# EAGLE board A10S-OLinuXino-MICRO (EAGLE 4.16), part 1 of 4
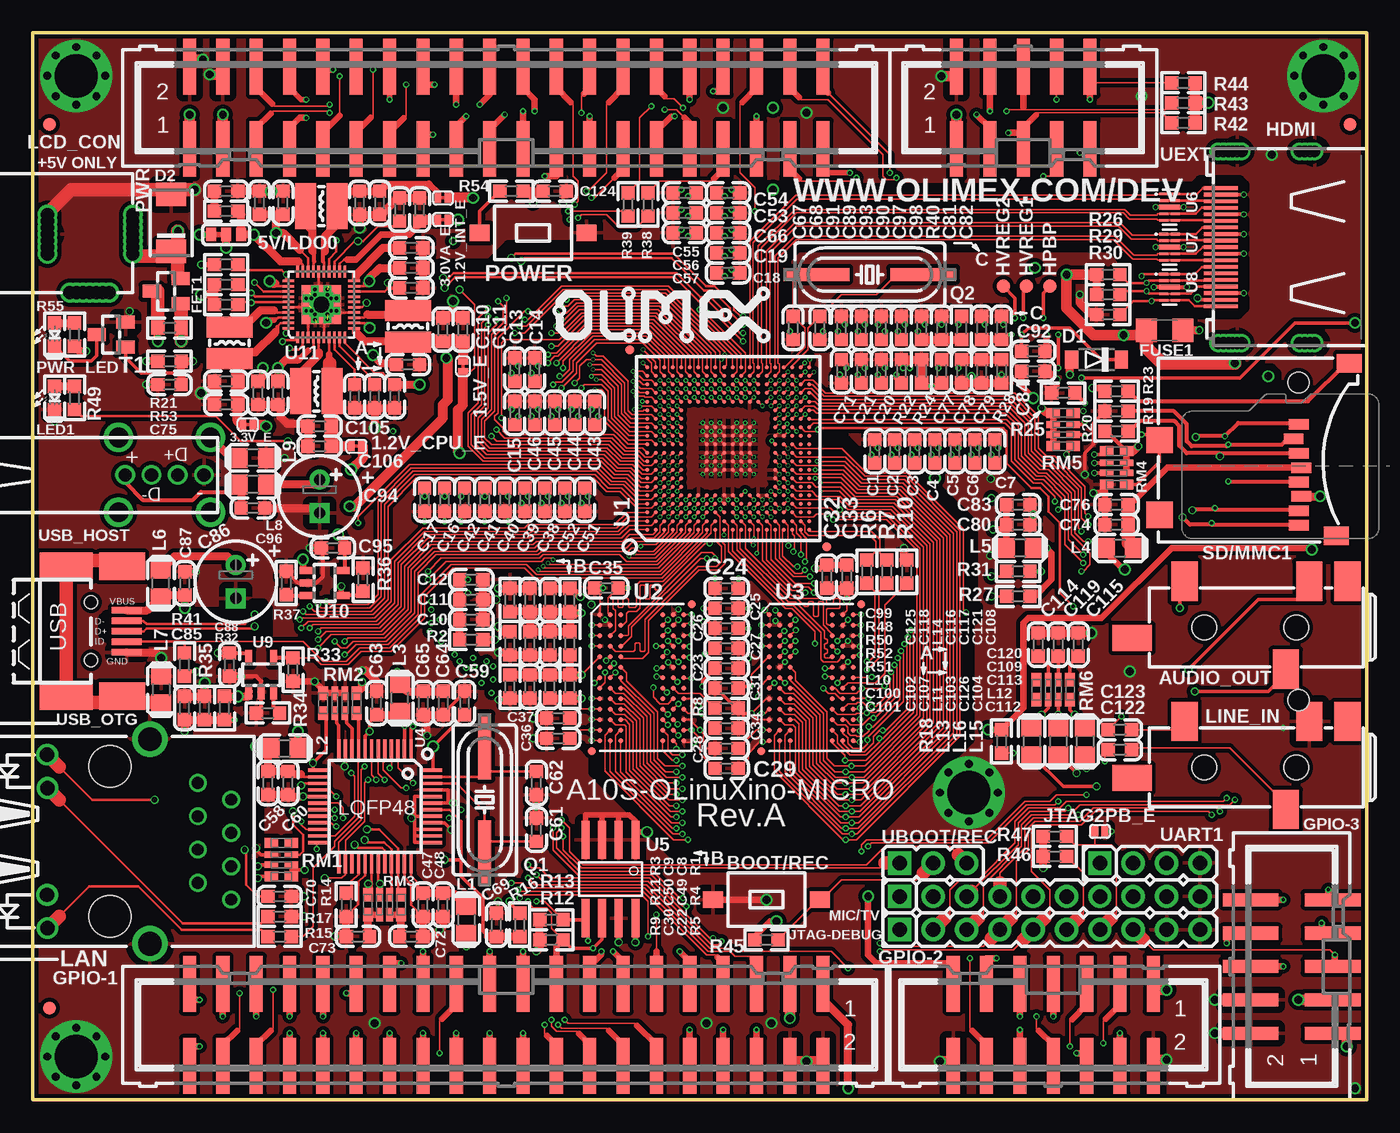
[diagram p0: board, top side]
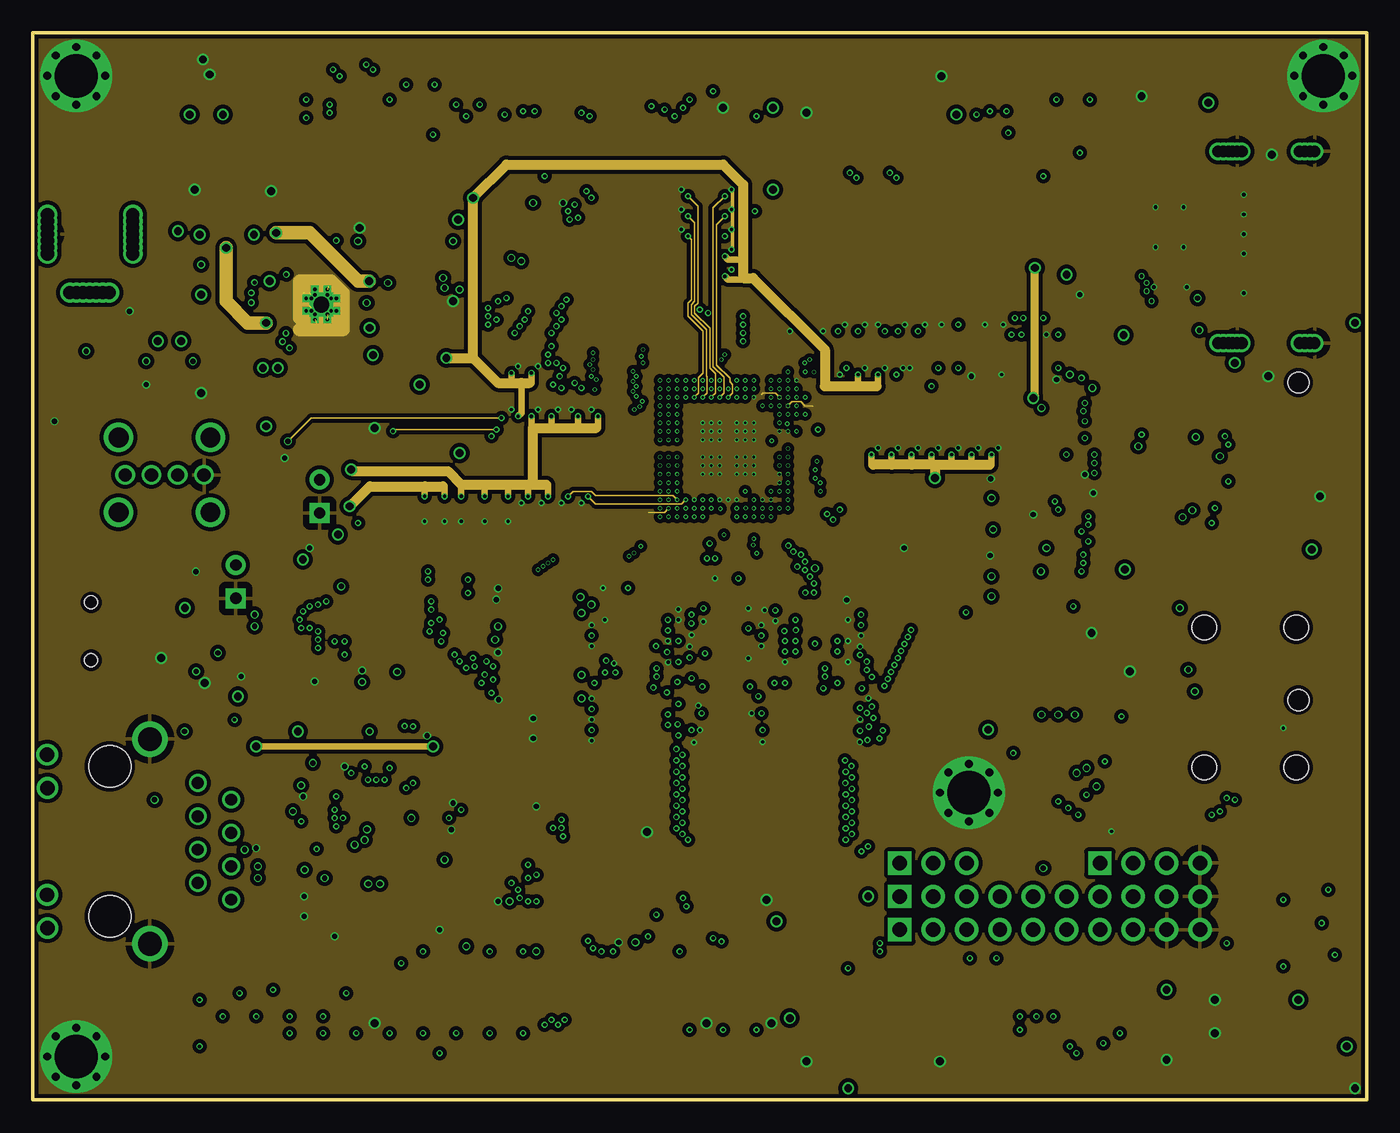
[diagram p1: board, inner layer Route2]
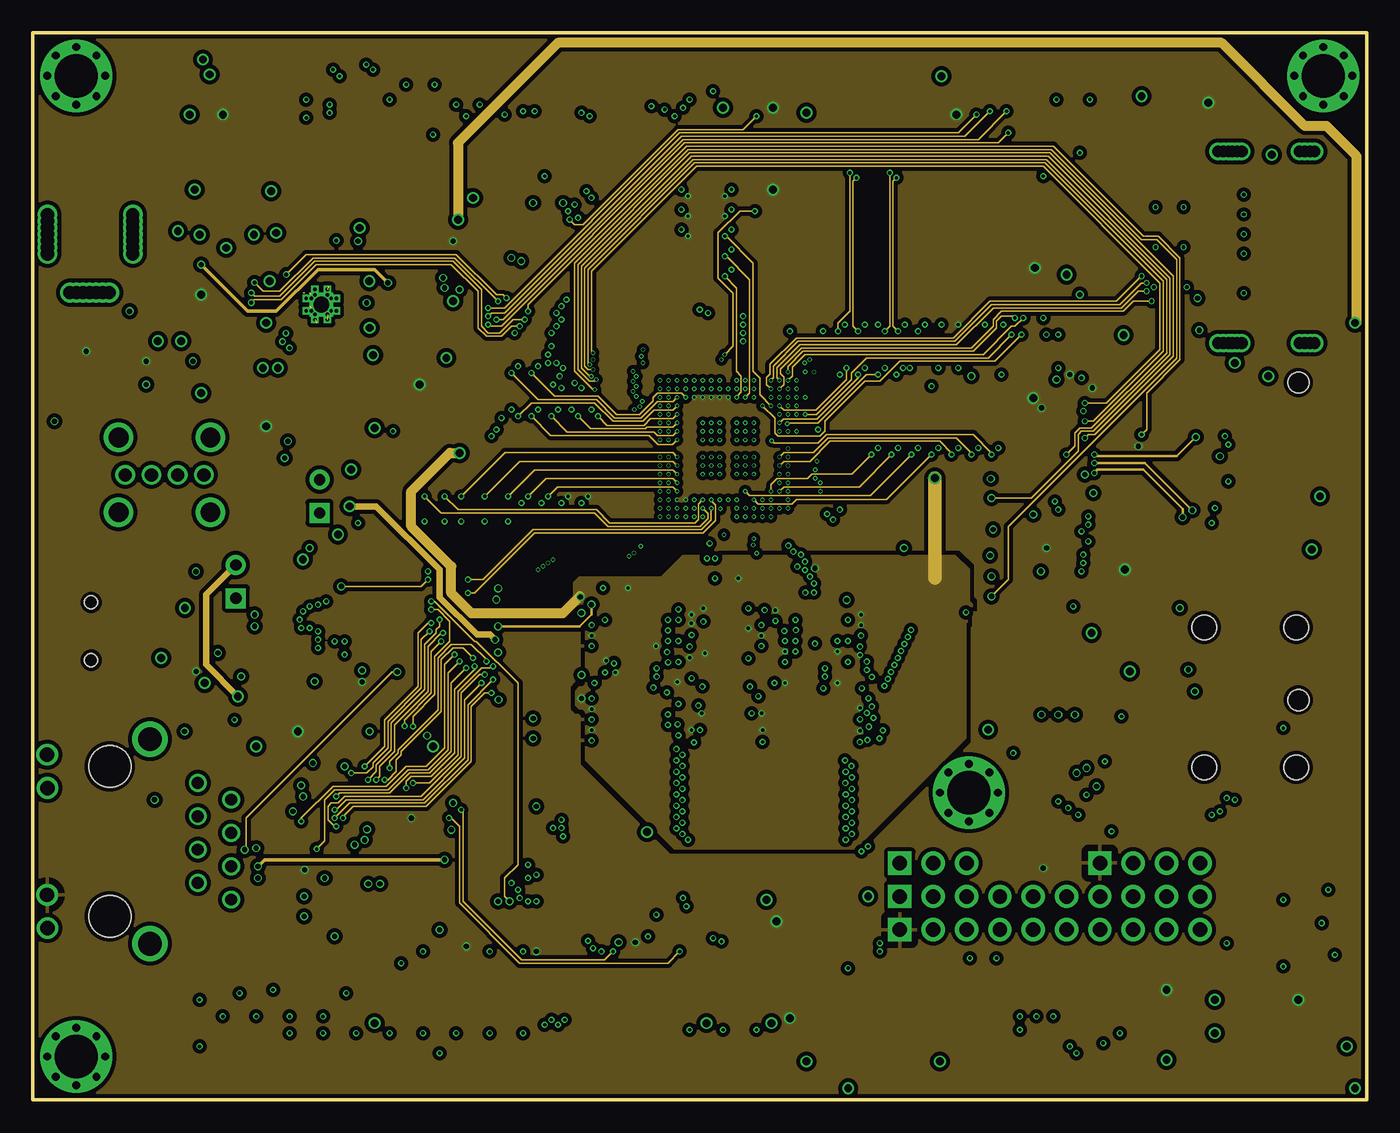
[diagram p2: board, inner layer Route15]
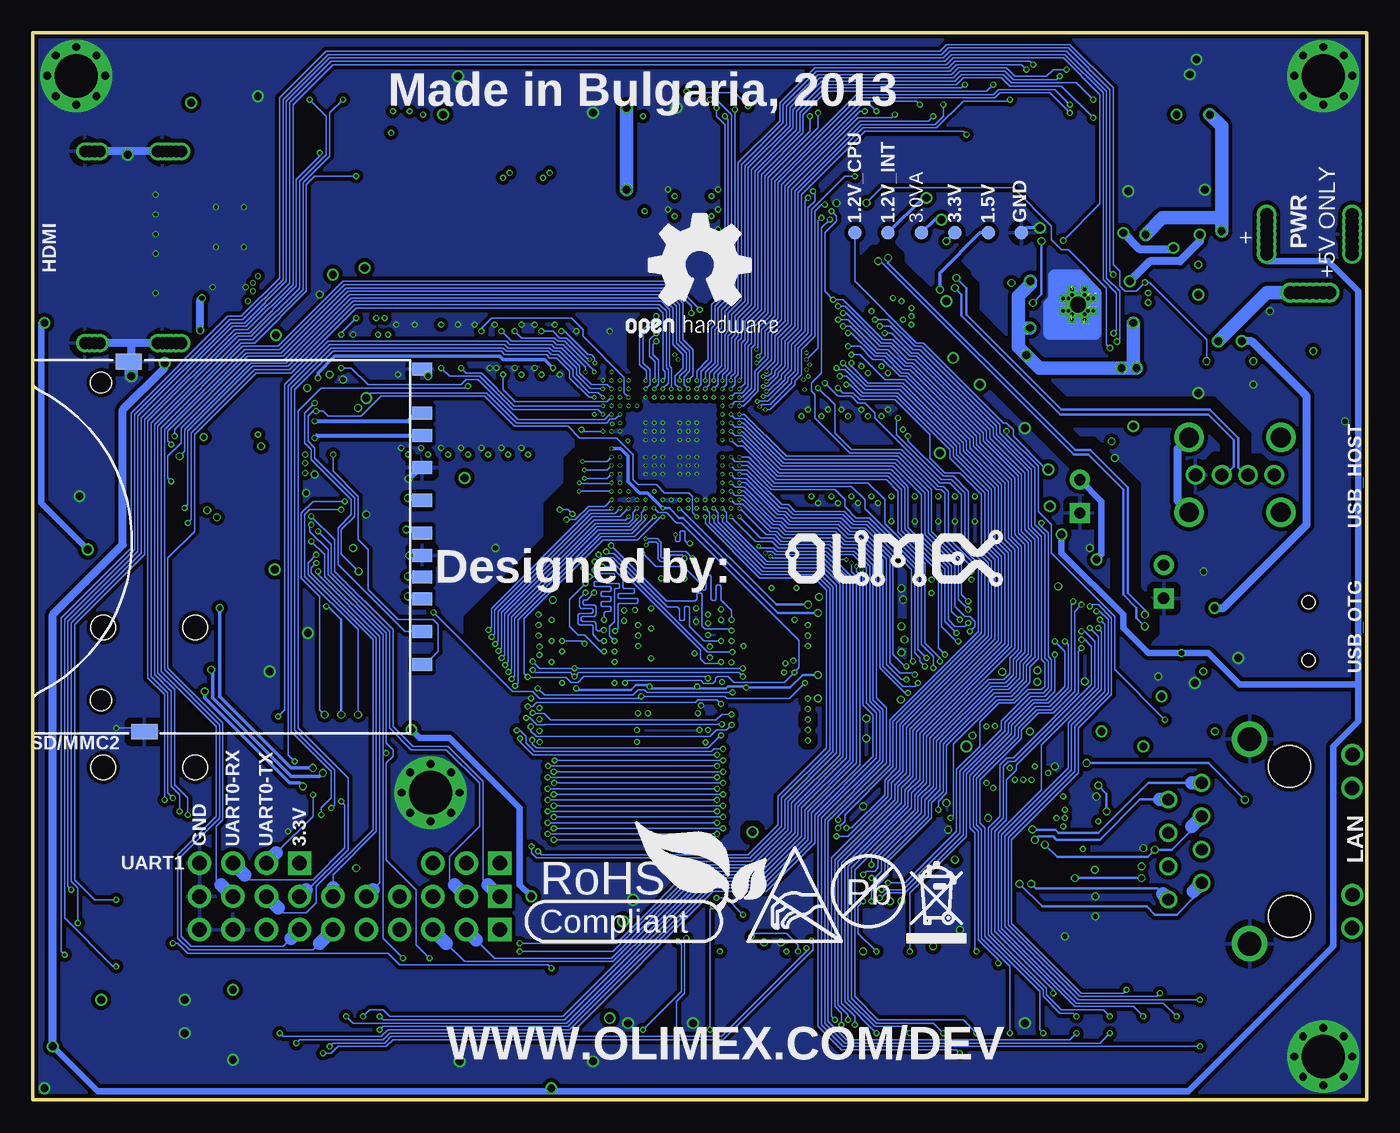
[diagram p3: board, bottom side, seen from below]

Size 101.6 x 81.28 mm. Coordinates in mm from the lower left corner, seen from the top.
Outline: 0,0 101.6,0 101.6,81.28 0,81.28 0,0
Copper layers (1*2*15*16): Top 0.018mm / dielectric 0.12mm / Route2 0.035mm / dielectric 1.2mm / Route15 0.035mm / dielectric 0.12mm / Bottom 0.018mm
Design rules "default": minimum track width 4mil, minimum drill 0.2mm, track to track 5mil, track to pad 0.1067mm, pad to pad 0.1067mm, via to via 0.1067mm, smd to smd 1mil, copper to edge 10mil, drill to drill 8mil, minimum pad ring 6mil, minimum via ring 2.5mil, stop-mask expansion 4mil, vias tented up to drill 25mil, thermal gap 20mil
Net classes: 0 default: width 0.107 mm; 1 PWR: width 0.107 mm, drill 0.076 mm, clearance 0.2 mm
tRestrict: 158 lines
bRestrict: 218 lines

## Footprints (pad centres in the part's own frame; a part is rotated, then mirrored left to right if it is on the bottom)
TESTPAD_40-ROUND = smd 1.016 x 1.016: 1 0,0
SJ_1_SMALLER_CLOSE = smd 0.508 x 0.762: 1 -0.381,0; 2 0.381,0
SJ_2_SMALL_12_TIED = smd 0.762 x 1.016: 1 -1.143,0; 2 0,0; 3 1.143,0
PJ-W47S-05D2-LF_5PIN_V2 = smd 2 x 3: 1 2.1,-0.5; 2 14.5,-0.5; 3 6.8,6.2; 5 5,-0.5 | smd 3 x 2: 4 18.5,3.8 | hole 1.9: 6,3; 13,3
SW-TAKT_6X3.5_SMD = smd 1.27 x 1.524: P$1 0,4.064; P$2 0,-4.064
C0603_DWS = smd 1.016 x 1.016: 1 -0.889,0; 2 0.889,0
E2,5-6,3 = drill 0.864 pad 1.524 round: + -1.27,0 | drill 0.864 pad 1.524 square: - 1.27,0
SOD-123 = smd 1 x 1.4: A 1.9,0; C -1.9,0
DO214AA = smd 1.778 x 2.286: A 2.177,0; C -2.177,0
SOT23 = smd 1 x 1.4: 1 -0.95,-1.1; 2 0.95,-1.1; 3 0,1.1
1206 = smd 1.6 x 1.8: 1 -1.4,0; 2 1.4,0
ML40-MALE(GBH-254-SMT-40) = smd 1 x 4.25: 1 -24.13,-3.125; 2 -24.13,3.125; 3 -21.59,-3.125; 4 -21.59,3.125; 5 -19.05,-3.125; 6 -19.05,3.125; 7 -16.51,-3.125; 8 -16.51,3.125; 9 -13.97,-3.125; 10 -13.97,3.125; 11 -11.43,-3.125; 12 -11.43,3.125; 13 -8.89,-3.125; 14 -8.89,3.125; 15 -6.35,-3.125; 16 -6.35,3.125; 17 -3.81,-3.125; 18 -3.81,3.125; 19 -1.27,-3.125; 20 -1.27,3.125; 21 1.27,-3.125; 22 1.27,3.125; 23 3.81,-3.125; 24 3.81,3.125; 25 6.35,-3.125; 26 6.35,3.125; 27 8.89,-3.125; 28 8.89,3.125; 29 11.43,-3.125; 30 11.43,3.125; 31 13.97,-3.125; 32 13.97,3.125; 33 16.51,-3.125; 34 16.51,3.125; 35 19.05,-3.125; 36 19.05,3.125; 37 21.59,-3.125; 38 21.59,3.125; 39 24.13,-3.125; 40 24.13,3.125
ML14_S = smd 1 x 4.25: 1 -7.62,-3.125; 2 -7.62,3.125; 3 -5.08,-3.125; 4 -5.08,3.125; 5 -2.54,-3.125; 6 -2.54,3.125; 7 0,-3.125; 8 0,3.125; 9 2.54,-3.125; 10 2.54,3.125; 11 5.08,-3.125; 12 5.08,3.125; 13 7.62,-3.125; 14 7.62,3.125
ML10_S = smd 1 x 4.25: 1 -5.08,-3.125; 2 -5.08,3.125; 3 -2.54,-3.125; 4 -2.54,3.125; 5 0,-3.125; 6 0,3.125; 7 2.54,-3.125; 8 2.54,3.125; 9 5.08,-3.125; 10 5.08,3.125
HDMI-SWM-19 = smd 2.6 x 0.28: 1 1.3,4.5; 2 1.3,4; 3 1.3,3.5; 4 1.3,3; 5 1.3,2.5; 6 1.3,2; 7 1.3,1.5; 8 1.3,1; 9 1.3,0.5; 10 1.3,0; 11 1.3,-0.5; 12 1.3,-1; 13 1.3,-1.5; 14 1.3,-2; 15 1.3,-2.5; 16 1.3,-3; 17 1.3,-3.5; 18 1.3,-4; 19 1.3,-4.5 | drill 0.9 round: P$5 1.5,7.3; P$7 7.7,7.3; P$9 7.7,-7.3; P$11 1.5,-7.3; P$13 1.9,7.3; P$15 8.1,7.3; P$18 8.1,-7.3; P$20 1.9,-7.3; P$21 2.2,7.3; P$22 2.9,7.3; P$23 2.9,-7.3; P$24 2.2,-7.3; P$25 1.1,7.3; P$26 1.1,-7.3; P$27 7.3,-7.3; P$28 7.3,7.3; SH1 2.55,7.3; SH2 8.45,7.3; SH3 8.45,-7.3; SH4 2.55,-7.3
SJ_1_SMALLER = smd 0.508 x 0.762: 1 -0.381,0; 2 0.381,0
HN1X10 = drill 1.1 pad 1.778 square: 1 -11.43,0 | drill 1.1 pad 1.778 round: 2 -8.89,0; 3 -6.35,0; 4 -3.81,0; 5 -1.27,0; 6 1.27,0; 7 3.81,0; 8 6.35,0; 9 8.89,0; 10 11.43,0
L0805_5MIL_DWS = smd 1.27 x 1.524: 1 -1.016,0; 2 1.016,0
CD32 = smd 3.5 x 1.6: 1 0,1.2; 2 0,-1.2
RJLBC-060TC1 = drill 0.9 round: 1 -4.455,6.7; 2 -3.185,9.24; 3 -1.915,6.7; 4 -0.645,9.24; 5 0.625,6.7; 6 1.895,9.24; 7 3.165,6.7; 8 4.435,9.24 | drill 1.1 round: AG 4.07,-4.773; AY -6.61,-4.773; KG 6.61,-4.748; KY -4.07,-4.748 | drill 1.8 round: GND1 -7.8,3.05; GND2 7.8,3.05 | hole 3.2: -5.715,0; 5.715,0
LED-0603 = smd 1.016 x 1.016: A 0.889,0; C -0.889,0
PWR_JACK_UNI_MILLING = drill 1 round: + 0,4.75; +1 0,5.25; +2 0,5.75; +3 0,6.25; +4 0,4.25; +5 0,3.75; +6 0,3.25; - -6.5,4.75; -1 -6.5,5.25; -2 -6.5,5.75; -3 -6.5,4.25; -4 -6.5,3.75; -5 -6.5,6.25; -6 -6.5,3.25; -- -3.3,0.3; --1 -3.8,0.3; --2 -4.3,0.3; --3 -4.8,0.3; --4 -2.8,0.3; --5 -2.3,0.3; --6 -1.8,0.3
HC49/SMD2_THIN = smd 5 x 1: 1 -4.064,0; 2 4.064,0
R0603_5MIL_DWS = smd 1.016 x 1.016: 1 -0.889,0; 2 0.889,0
0603_0R = smd 1.016 x 1.016: 1 -0.889,0; 2 0.889,0
R_MATRIX_4 = smd 1.016 x 0.762: 1.1 -0.762,1.27; 1.2 0.762,1.27; 4.1 -0.762,-1.27; 4.2 0.762,-1.27 | smd 1.016 x 0.508: 2.1 -0.762,0.381; 2.2 0.762,0.381; 3.1 -0.762,-0.381; 3.2 0.762,-0.381
TFR-MEM-CON = smd 0.8 x 1.5: 1 -3.2,10.7; 2 -2.1,10.3; 3 -1,10.7; 4 0.1,10.9; 5 1.2,10.7; 6 2.3,10.9; 7 3.4,10.7; 8 4.5,10.7 | smd 2 x 2: 9 3.7,0.1; 10 -2,0.1 | smd 1.4 x 1.9: 11 5.3,13.55; 12 -7.85,14.55
SD_CARD = smd 1 x 1.5: 1 6.88,15.3; 2 4.38,15.3; 3 1.08,15.3; 4 -0.63,15.3; 5 -3.13,15.3; 6 -5.63,15.3; 7 -8.06,15.3; 8 -9.76,15.3; 9 9.38,15.3; CD 2.73,15.3; WP -13.11,15.3 | smd 1.2 x 2: SH1 -13.7,-7.05; SH2 14.5,-5.85 | hole 1.6: -12.09,-9.15; 12.1,-9.15
SOT-23 = smd 1 x 1.4: 1 -0.95,-1.1; 2 0.95,-1.1; 3 0,1.1
TFBGA336 = smd 0.32 x 0.32: A1 -6.175,6.175; A2 -5.525,6.175; A3 -4.875,6.175; A4 -4.225,6.175; A5 -3.575,6.175; A6 -2.925,6.175; A7 -2.275,6.175; A8 -1.625,6.175; A9 -0.975,6.175; A10 -0.325,6.175; A11 0.325,6.175; A12 0.975,6.175; A13 1.625,6.175; A14 2.275,6.175; A15 2.925,6.175; A16 3.575,6.175; A17 4.225,6.175; A18 4.875,6.175; A19 5.525,6.175; A20 6.175,6.175; B1 -6.175,5.525; B2 -5.525,5.525; B3 -4.875,5.525; B4 -4.225,5.525; B5 -3.575,5.525; B6 -2.925,5.525; B7 -2.275,5.525; B8 -1.625,5.525; B9 -0.975,5.525; B10 -0.325,5.525; B11 0.325,5.525; B12 0.975,5.525; B13 1.625,5.525; B14 2.275,5.525; B15 2.925,5.525; B16 3.575,5.525; B17 4.225,5.525; B18 4.875,5.525; B19 5.525,5.525; B20 6.175,5.525; C1 -6.175,4.875; C2 -5.525,4.875; C3 -4.875,4.875; C4 -4.225,4.875; C5 -3.575,4.875; C6 -2.925,4.875; C7 -2.275,4.875; C8 -1.625,4.875; C9 -0.975,4.875; C10 -0.325,4.875; C11 0.325,4.875; C12 0.975,4.875; C13 1.625,4.875; C14 2.275,4.875; C15 2.925,4.875; C16 3.575,4.875; C17 4.225,4.875; C18 4.875,4.875; C19 5.525,4.875; C20 6.175,4.875; D1 -6.175,4.225; D2 -5.525,4.225; D3 -4.875,4.225; D4 -4.225,4.225; D5 -3.575,4.225; D6 -2.925,4.225; D7 -2.275,4.225; D8 -1.625,4.225; D9 -0.975,4.225; D10 -0.325,4.225; D11 0.325,4.225; D12 0.975,4.225; D13 1.625,4.225; D14 2.275,4.225; D15 2.925,4.225; D16 3.575,4.225; D17 4.225,4.225; D18 4.875,4.225; D19 5.525,4.225; D20 6.175,4.225; E1 -6.175,3.575; E2 -5.525,3.575; E3 -4.875,3.575; E4 -4.225,3.575; E5 -3.575,3.575; E6 -2.925,3.575; E7 -2.275,3.575; E8 -1.625,3.575; E9 -0.975,3.575; E10 -0.325,3.575; E11 0.325,3.575; E12 0.975,3.575; E13 1.625,3.575; E14 2.275,3.575; E15 2.925,3.575; E16 3.575,3.575; E17 4.225,3.575; E18 4.875,3.575; E19 5.525,3.575; E20 6.175,3.575; F1 -6.175,2.925; F2 -5.525,2.925; F3 -4.875,2.925; F4 -4.225,2.925; F5 -3.575,2.925; F16 3.575,2.925; F17 4.225,2.925; F18 4.875,2.925; F19 5.525,2.925; F20 6.175,2.925; G1 -6.175,2.275; G2 -5.525,2.275; G3 -4.875,2.275; G4 -4.225,2.275; G5 -3.575,2.275; G16 3.575,2.275; G17 4.225,2.275; G18 4.875,2.275; G19 5.525,2.275; G20 6.175,2.275; H1 -6.175,1.625; H2 -5.525,1.625; H3 -4.875,1.625; H4 -4.225,1.625; H5 -3.575,1.625; H8 -1.625,1.625; H9 -0.975,1.625; H10 -0.325,1.625; H11 0.325,1.625; H12 0.975,1.625; H13 1.625,1.625; H16 3.575,1.625; H17 4.225,1.625; H18 4.875,1.625; H19 5.525,1.625; H20 6.175,1.625; J1 -6.175,0.975; J2 -5.525,0.975; J3 -4.875,0.975; J4 -4.225,0.975; J5 -3.575,0.975; J8 -1.625,0.975; J9 -0.975,0.975; J10 -0.325,0.975; J11 0.325,0.975; J12 0.975,0.975; J13 1.625,0.975; J16 3.575,0.975; J17 4.225,0.975; J18 4.875,0.975; J19 5.525,0.975; J20 6.175,0.975; K1 -6.175,0.325; K2 -5.525,0.325; K3 -4.875,0.325; K4 -4.225,0.325; K5 -3.575,0.325; K8 -1.625,0.325; K9 -0.975,0.325; K10 -0.325,0.325; K11 0.325,0.325; K12 0.975,0.325; K13 1.625,0.325; K16 3.575,0.325; K17 4.225,0.325; K18 4.875,0.325; K19 5.525,0.325; K20 6.175,0.325; L1 -6.175,-0.325; L2 -5.525,-0.325; L3 -4.875,-0.325; L4 -4.225,-0.325; L5 -3.575,-0.325; L8 -1.625,-0.325; L9 -0.975,-0.325; L10 -0.325,-0.325; L11 0.325,-0.325; L12 0.975,-0.325; L13 1.625,-0.325; L16 3.575,-0.325; L17 4.225,-0.325; L18 4.875,-0.325; L19 5.525,-0.325; L20 6.175,-0.325; M1 -6.175,-0.975; M2 -5.525,-0.975; M3 -4.875,-0.975; M4 -4.225,-0.975; M5 -3.575,-0.975; M8 -1.625,-0.975; M9 -0.975,-0.975; M10 -0.325,-0.975; M11 0.325,-0.975; M12 0.975,-0.975; M13 1.625,-0.975; M16 3.575,-0.975; M17 4.225,-0.975; M18 4.875,-0.975; M19 5.525,-0.975; M20 6.175,-0.975; N1 -6.175,-1.625; N2 -5.525,-1.625; N3 -4.875,-1.625; N4 -4.225,-1.625; N5 -3.575,-1.625; N8 -1.625,-1.625; N9 -0.975,-1.625; N10 -0.325,-1.625; N11 0.325,-1.625; N12 0.975,-1.625; N13 1.625,-1.625; N16 3.575,-1.625; N17 4.225,-1.625; N18 4.875,-1.625; N19 5.525,-1.625; N20 6.175,-1.625; P1 -6.175,-2.275; P2 -5.525,-2.275; P3 -4.875,-2.275; P4 -4.225,-2.275; P5 -3.575,-2.275; P16 3.575,-2.275; P17 4.225,-2.275; P18 4.875,-2.275; P19 5.525,-2.275; P20 6.175,-2.275; R1 -6.175,-2.925; R2 -5.525,-2.925; R3 -4.875,-2.925; R4 -4.225,-2.925; R5 -3.575,-2.925; R16 3.575,-2.925; R17 4.225,-2.925; R18 4.875,-2.925; R19 5.525,-2.925; R20 6.175,-2.925; T1 -6.175,-3.575; T2 -5.525,-3.575; T3 -4.875,-3.575; T4 -4.225,-3.575; T5 -3.575,-3.575; T6 -2.925,-3.575; T7 -2.275,-3.575; T8 -1.625,-3.575; T9 -0.975,-3.575; T10 -0.325,-3.575; T11 0.325,-3.575; T12 0.975,-3.575; T13 1.625,-3.575; T14 2.275,-3.575; T15 2.925,-3.575; T16 3.575,-3.575; T17 4.225,-3.575; T18 4.875,-3.575; T19 5.525,-3.575; T20 6.175,-3.575; U1 -6.175,-4.225; U2 -5.525,-4.225; U3 -4.875,-4.225; U4 -4.225,-4.225; U5 -3.575,-4.225; U6 -2.925,-4.225; U7 -2.275,-4.225; U8 -1.625,-4.225; U9 -0.975,-4.225; U10 -0.325,-4.225; U11 0.325,-4.225; U12 0.975,-4.225; U13 1.625,-4.225; U14 2.275,-4.225; U15 2.925,-4.225; U16 3.575,-4.225; U17 4.225,-4.225; U18 4.875,-4.225; U19 5.525,-4.225; U20 6.175,-4.225; V1 -6.175,-4.875; V2 -5.525,-4.875; V3 -4.875,-4.875; V4 -4.225,-4.875; V5 -3.575,-4.875; V6 -2.925,-4.875; V7 -2.275,-4.875; V8 -1.625,-4.875; V9 -0.975,-4.875; V10 -0.325,-4.875; V11 0.325,-4.875; V12 0.975,-4.875; V13 1.625,-4.875; V14 2.275,-4.875; V15 2.925,-4.875; V16 3.575,-4.875; V17 4.225,-4.875; V18 4.875,-4.875; V19 5.525,-4.875; V20 6.175,-4.875; W1 -6.175,-5.525; W2 -5.525,-5.525; W3 -4.875,-5.525; W4 -4.225,-5.525; W5 -3.575,-5.525; W6 -2.925,-5.525; W7 -2.275,-5.525; W8 -1.625,-5.525; W9 -0.975,-5.525; W10 -0.325,-5.525; W11 0.325,-5.525; W12 0.975,-5.525; W13 1.625,-5.525; W14 2.275,-5.525; W15 2.925,-5.525; W16 3.575,-5.525; W17 4.225,-5.525; W18 4.875,-5.525; W19 5.525,-5.525; W20 6.175,-5.525; Y1 -6.175,-6.175; Y2 -5.525,-6.175; Y3 -4.875,-6.175; Y4 -4.225,-6.175; Y5 -3.575,-6.175; Y6 -2.925,-6.175; Y7 -2.275,-6.175; Y8 -1.625,-6.175; Y9 -0.975,-6.175; Y10 -0.325,-6.175; Y11 0.325,-6.175; Y12 0.975,-6.175; Y13 1.625,-6.175; Y14 2.275,-6.175; Y15 2.925,-6.175; Y16 3.575,-6.175; Y17 4.225,-6.175; Y18 4.875,-6.175; Y19 5.525,-6.175; Y20 6.175,-6.175 | smd 0.7 x 0.7: FID1 -7.5,-7.5; FID2 7.5,7.5
FBGA78 = smd 0.4 x 0.4: A1 -3.2,4.8; A2 -2.4,4.8; A3 -1.6,4.8; A7 1.6,4.8; A8 2.4,4.8; A9 3.2,4.8; B1 -3.2,4; B2 -2.4,4; B3 -1.6,4; B7 1.6,4; B8 2.4,4; B9 3.2,4; C1 -3.2,3.2; C2 -2.4,3.2; C3 -1.6,3.2; C7 1.6,3.2; C8 2.4,3.2; C9 3.2,3.2; D1 -3.2,2.4; D2 -2.4,2.4; D3 -1.6,2.4; D7 1.6,2.4; D8 2.4,2.4; D9 3.2,2.4; E1 -3.2,1.6; E2 -2.4,1.6; E3 -1.6,1.6; E7 1.6,1.6; E8 2.4,1.6; E9 3.2,1.6; F1 -3.2,0.8; F2 -2.4,0.8; F3 -1.6,0.8; F7 1.6,0.8; F8 2.4,0.8; F9 3.2,0.8; G1 -3.2,0; G2 -2.4,0; G3 -1.6,0; G7 1.6,0; G8 2.4,0; G9 3.2,0; H1 -3.2,-0.8; H2 -2.4,-0.8; H3 -1.6,-0.8; H7 1.6,-0.8; H8 2.4,-0.8; H9 3.2,-0.8; J1 -3.2,-1.6; J2 -2.4,-1.6; J3 -1.6,-1.6; J7 1.6,-1.6; J8 2.4,-1.6; J9 3.2,-1.6; K1 -3.2,-2.4; K2 -2.4,-2.4; K3 -1.6,-2.4; K7 1.6,-2.4; K8 2.4,-2.4; K9 3.2,-2.4; L1 -3.2,-3.2; L2 -2.4,-3.2; L3 -1.6,-3.2; L7 1.6,-3.2; L8 2.4,-3.2; L9 3.2,-3.2; M1 -3.2,-4; M2 -2.4,-4; M3 -1.6,-4; M7 1.6,-4; M8 2.4,-4; M9 3.2,-4; N1 -3.2,-4.8; N2 -2.4,-4.8; N3 -1.6,-4.8; N7 1.6,-4.8; N8 2.4,-4.8; N9 3.2,-4.8 | smd 0.6 x 0.6: FID1 -3.8,-5.6; FID2 3.8,5.6
LQFP48 = smd 0.254 x 1.6: 1 -2.75,-4.3; 2 -2.25,-4.3; 3 -1.75,-4.3; 4 -1.25,-4.3; 5 -0.75,-4.3; 6 -0.25,-4.3; 7 0.25,-4.3; 8 0.75,-4.3; 9 1.25,-4.3; 10 1.75,-4.3; 11 2.25,-4.3; 12 2.75,-4.3; 25 2.75,4.3; 26 2.25,4.3; 27 1.75,4.3; 28 1.25,4.3; 29 0.75,4.3; 30 0.25,4.3; 31 -0.25,4.3; 32 -0.75,4.3; 33 -1.25,4.3; 34 -1.75,4.3; 35 -2.25,4.3; 36 -2.75,4.3 | smd 1.6 x 0.254: 13 4.3,-2.75; 14 4.3,-2.25; 15 4.3,-1.75; 16 4.3,-1.25; 17 4.3,-0.75; 18 4.3,-0.25; 19 4.3,0.25; 20 4.3,0.75; 21 4.3,1.25; 22 4.3,1.75; 23 4.3,2.25; 24 4.3,2.75; 37 -4.3,2.75; 38 -4.3,2.25; 39 -4.3,1.75; 40 -4.3,1.25; 41 -4.3,0.75; 42 -4.3,0.25; 43 -4.3,-0.25; 44 -4.3,-0.75; 45 -4.3,-1.25; 46 -4.3,-1.75; 47 -4.3,-2.25; 48 -4.3,-2.75
SO-08MN = smd 0.61 x 2.921: 1 -1.905,-2.981; 2 -0.635,-2.981; 3 0.635,-2.981; 4 1.905,-2.981; 5 1.905,2.981; 6 0.635,2.981; 7 -0.635,2.981; 8 -1.905,2.981
SLP2510P8 = smd 0.2 x 0.675: 1 -1,-0.438; 2 -0.5,-0.438; 4 0.5,-0.438; 5 1,-0.438; 6 1,0.438; 7 0.5,0.438; 9 -0.5,0.438; 10 -1,0.438 | smd 0.4 x 0.775: 3 0,-0.388; 8 0,0.388
SOT23-5 = smd 0.55 x 1.2: 1 -0.95,-1.3; 2 0,-1.3; 3 0.95,-1.3; 4 0.95,1.3; 5 -0.95,1.3
QFN40_5X5 = smd 0.2 x 0.9: 1 -1.8,-2.5; 2 -1.4,-2.5; 3 -1,-2.5; 4 -0.6,-2.5; 5 -0.2,-2.5; 6 0.2,-2.5; 7 0.6,-2.5; 8 1,-2.5; 9 1.4,-2.5; 10 1.8,-2.5; 21 1.8,2.5; 22 1.4,2.5; 23 1,2.5; 24 0.6,2.5; 25 0.2,2.5; 26 -0.2,2.5; 27 -0.6,2.5; 28 -1,2.5; 29 -1.4,2.5; 30 -1.8,2.5 | smd 0.9 x 0.2: 11 2.5,-1.8; 12 2.5,-1.4; 13 2.5,-1; 14 2.5,-0.6; 15 2.5,-0.2; 16 2.5,0.2; 17 2.5,0.6; 18 2.5,1; 19 2.5,1.4; 20 2.5,1.8; 31 -2.5,1.8; 32 -2.5,1.4; 33 -2.5,1; 34 -2.5,0.6; 35 -2.5,0.2; 36 -2.5,-0.2; 37 -2.5,-0.6; 38 -2.5,-1; 39 -2.5,-1.4; 40 -2.5,-1.8 | drill 1.2 pad 1.422 square: N1 0,0 | drill 0.254 pad 0.4 square: N2 -1.15,0.475; N3 -0.75,0.475; N4 -1.15,-0.475; N5 -0.75,-0.475; N6 -0.475,-1.15; N7 -0.475,-0.75; N8 0.475,-1.15; N9 0.475,-0.75; N10 1.15,-0.475; N11 0.75,-0.475; N12 1.15,0.475; N13 0.75,0.475; N14 0.475,1.15; N15 0.475,0.75; N16 -0.475,1.15; N17 -0.475,0.75 | smd 3 x 3: VSS 0,0
FIDUCIAL-1X2 = smd 1 x 1: 1 0,0
HN1X4 = drill 1.1 pad 1.778 square: 1 -3.81,0 | drill 1.1 pad 1.778 round: 2 -1.27,0; 3 1.27,0; 4 3.81,0
JP2 = drill 1.1 pad 1.778 square: 1 -2.54,0 | drill 1.1 pad 1.778 round: 2 0,0; 3 2.54,0
USB_A_VERTICAL_PTH = drill 1 round: 1 3.45,12.75; 2 3.45,14.75; 3 3.45,16.75; 4 3.45,18.75 | drill 1.5 round: P$1 0.6,12.25; P$2 6.3,12.25; P$3 6.3,19.25; P$4 0.6,19.25
USB_MINI_9PIN = smd 2.25 x 0.5: D+ 2.706,0; D- 2.706,0.8; GND 2.706,-1.6; ID 2.706,-0.8; VBUS 2.706,1.6 | smd 4 x 2.1: GND1 -1.9,4.95; GND3 -1.9,-4.95 | smd 3.5 x 2.1: GND2 2.35,4.95; GND4 2.35,-4.95 | hole 1: 0,2.2; 0,-2.2

## Placement (x,y rotation side)
1.2V_CPU  TESTPADTESTPAD_40-ROUND  [TESTPAD_40-ROUND]  38.99,66.04 270 bottom
1.2V_CPU_E  Close  [SJ_1_SMALLER_CLOSE]  24.64,49.78 0 top
1.2V_INT  TESTPADTESTPAD_40-ROUND  [TESTPAD_40-ROUND]  36.45,66.04 270 bottom
1.2V_INT_E  Close  [SJ_1_SMALLER_CLOSE]  31.24,68.71 0 top
1.5V  TESTPADTESTPAD_40-ROUND  [TESTPAD_40-ROUND]  28.83,66.04 270 bottom
1.5V_E  Close  [SJ_1_SMALLER_CLOSE]  32.77,55.88 270 top
3.0VA  TESTPADTESTPAD_40-ROUND  [TESTPAD_40-ROUND]  33.91,66.04 270 bottom
3.0VA_E  Close  [SJ_1_SMALLER_CLOSE]  31.24,67.06 0 top
3.3V  TESTPADTESTPAD_40-ROUND  [TESTPAD_40-ROUND]  31.37,66.04 270 bottom
3.3V_E  Close  [SJ_1_SMALLER_CLOSE]  16.38,51.44 0 top
5V/LDO0  5V:Open/LDO0:Close  [SJ_2_SMALL_12_TIED]  14.73,65.91 0 top
AUDIO_OUT  PJ-W47S-05D2-LF_V2  [PJ-W47S-05D2-LF_5PIN_V2]  102.23,38.99 180 top
BOOT/REC  T1107A(6x3.8x2.5mm)  [SW-TAKT_6X3.5_SMD]  55.88,15.24 90 top
C1  220nF  [C0603_DWS]  64.14,49.4 270 top
C2  220nF  [C0603_DWS]  65.66,49.4 270 top
C3  220nF  [C0603_DWS]  67.18,49.4 270 top
C4  220nF  [C0603_DWS]  68.71,49.4 270 top
C5  220nF  [C0603_DWS]  70.23,49.4 270 top
C6  220nF  [C0603_DWS]  71.75,49.4 270 top
C7  220nF  [C0603_DWS]  73.28,49.4 270 top
C8  220nF  [C0603_DWS]  39.39,38.08 270 top
C9  220nF  [C0603_DWS]  37.86,38.08 270 top
C10  22uF/6.3V  [C0603_DWS]  33.4,36.58 180 top
C11  220nF  [C0603_DWS]  33.4,38.1 180 top
C12  220nF  [C0603_DWS]  33.4,39.62 180 top
C13  220nF  [C0603_DWS]  38.23,55.63 270 top
C14  220nF  [C0603_DWS]  36.7,55.63 270 top
C15  220nF  [C0603_DWS]  36.7,52.32 270 top
C16  220nF  [C0603_DWS]  31.37,45.72 90 top
C17  220nF  [C0603_DWS]  29.84,45.72 90 top
C18  220nF  [C0603_DWS]  52.96,62.99 180 top
C19  220nF  [C0603_DWS]  52.96,64.52 180 top
C20  220nF  [C0603_DWS]  64.64,55.5 270 top
C21  220nF  [C0603_DWS]  63.12,55.5 270 top
C22  220nF  [C0603_DWS]  39.39,31.47 90 top
C23  220nF  [C0603_DWS]  52.85,32.87 180 top
C24  220nF  [C0603_DWS]  52.85,38.97 0 top
C25  220nF  [C0603_DWS]  52.85,37.44 180 top
C26  220nF  [C0603_DWS]  52.85,35.92 0 top
C27  220nF  [C0603_DWS]  52.85,34.39 180 top
C28  220nF  [C0603_DWS]  52.85,26.77 0 top
C29  220nF  [C0603_DWS]  52.85,25.25 180 top
C30  220nF  [C0603_DWS]  37.86,31.47 90 top
C31  220nF  [C0603_DWS]  52.85,31.34 0 top
C32  220nF  [C0603_DWS]  60.47,39.85 90 top
C33  220nF  [C0603_DWS]  61.99,39.85 90 top
C34  220nF  [C0603_DWS]  52.85,28.3 180 top
C35  220nF  [C0603_DWS]  43.69,38.99 0 top
C36  220nF  [C0603_DWS]  40.02,27.54 0 top
C37  220nF  [C0603_DWS]  40.02,29.06 0 top
C38  220nF  [C0603_DWS]  38.99,45.72 90 top
C39  220nF  [C0603_DWS]  37.47,45.72 90 top
C40  220nF  [C0603_DWS]  35.94,45.72 90 top
C41  220nF  [C0603_DWS]  34.42,45.72 90 top
C42  220nF  [C0603_DWS]  32.89,45.72 90 top
C43  220nF  [C0603_DWS]  42.8,52.32 270 top
C44  220nF  [C0603_DWS]  41.27,52.32 270 top
C45  220nF  [C0603_DWS]  39.75,52.32 270 top
C46  220nF  [C0603_DWS]  38.23,52.32 270 top
C47  100nF  [C0603_DWS]  29.72,14.86 90 top
C48  22uF/6.3V  [C0603_DWS]  31.24,14.86 90 top
C49  100nF  [C0603_DWS]  39.39,34.77 90 top
C50  100nF  [C0603_DWS]  37.86,34.77 90 top
C51  220nF  [C0603_DWS]  42.04,45.72 90 top
C52  220nF  [C0603_DWS]  40.51,45.72 90 top
C53  220nF  [C0603_DWS]  52.96,67.56 180 top
C54  220nF  [C0603_DWS]  52.96,69.09 180 top
C55  220nF  [C0603_DWS]  49.66,69.09 0 top
C56  220nF  [C0603_DWS]  49.66,67.56 0 top
C57  220nF  [C0603_DWS]  49.66,66.04 0 top
C58  100nF  [C0603_DWS]  17.91,24.13 90 top
C59  100nF  [C0603_DWS]  32.89,30.23 270 top
C60  22uF/6.3V  [C0603_DWS]  19.43,24.13 90 top
C61  33pF  [C0603_DWS]  38.35,20.57 270 top
C62  33pF  [C0603_DWS]  38.35,24.13 90 top
C63  100nF  [C0603_DWS]  26.19,30.23 90 top
C64  100nF  [C0603_DWS]  31.27,30.23 270 top
C65  22uF/6.3V  [C0603_DWS]  29.74,30.23 270 top
C66  NA  [C0603_DWS]  52.96,66.04 180 top
C67  33pF  [C0603_DWS]  57.91,58.8 90 top
C68  33pF  [C0603_DWS]  59.94,58.8 90 top
C69  100nF  [C0603_DWS]  35.31,13.34 270 top
C70  100nF  [C0603_DWS]  18.8,15.49 180 top
C71  22uF/6.3V  [C0603_DWS]  61.59,55.5 90 top
C72  100nF  [C0603_DWS]  28.83,12.45 180 top
C73  100nF  [C0603_DWS]  24.77,12.45 0 top
C74  22uF/6.3V  [C0603_DWS]  82.55,43.81 0 top
C75  NA  [C0603_DWS]  10.41,54.48 0 top
C76  22uF/6.3V  [C0603_DWS]  82.55,45.34 0 top
C77  1uF  [C0603_DWS]  69.22,55.5 90 top
C78  220nF  [C0603_DWS]  70.74,55.5 90 top
C79  10uF/6.3V  [C0603_DWS]  72.26,55.5 90 top
C80  22uF/6.3V  [C0603_DWS]  75.06,43.81 180 top
C81  10uF/6.3V  [C0603_DWS]  72.26,58.8 270 top
C82  220nF  [C0603_DWS]  73.79,58.8 270 top
C83  22uF/6.3V  [C0603_DWS]  75.06,45.34 180 top
C84  220nF  [C0603_DWS]  76.2,55.5 180 top
C85  100nF  [C0603_DWS]  11.56,29.84 90 top
C86  100uF/16V/LOWESR/105C/6.3x11mm_RM2.5  [E2,5-6,3]  15.47,39.47 270 top
C87  100nF  [C0603_DWS]  11.58,39.34 90 top
C88  100nF  [C0603_DWS]  14.99,33.15 270 top
C89  1nF  [C0603_DWS]  63.12,58.8 270 top
C90  1nF  [C0603_DWS]  66.17,58.8 270 top
C91  1nF  [C0603_DWS]  61.59,58.8 270 top
C92  220nF  [C0603_DWS]  76.2,57.02 180 top
C93  1nF  [C0603_DWS]  64.64,58.8 270 top
C94  100uF/16V/LOWESR/105C/6.3x11mm_RM2.5  [E2,5-6,3]  21.84,45.97 270 top
C95  10uF/6.3V  [C0603_DWS]  22.86,42.04 180 top
C96  100nF  [C0603_DWS]  16.76,45.09 0 top
C97  220nF  [C0603_DWS]  67.69,58.8 90 top
C98  22uF/6.3V  [C0603_DWS]  69.22,58.8 270 top
C99  10uF/6.3V  [C0603_DWS]  14.73,69.22 0 top
C100  10uF/6.3V  [C0603_DWS]  14.73,54.74 180 top
C101  1nF  [C0603_DWS]  14.73,52.96 180 top
C102  10uF/6.3V  [C0603_DWS]  17.14,53.85 270 top
C103  NA(10uF/6.3V)  [C0603_DWS]  24.51,53.59 270 top
C104  10uF/6.3V  [C0603_DWS]  27.56,53.59 270 top
C105  10uF/6.3V  [C0603_DWS]  21.84,51.31 180 top
C106  1nF  [C0603_DWS]  21.84,49.78 180 top
C107  10uF/6.3V  [C0603_DWS]  18.67,53.85 270 top
C108  10uF/6.3V  [C0603_DWS]  29.46,67.82 90 top
C109  10uF/6.3V  [C0603_DWS]  28.83,63.37 0 top
C110  10uF/6.3V  [C0603_DWS]  31.24,58.67 90 top
C111  1nF  [C0603_DWS]  32.77,58.67 90 top
C112  10uF/6.3V  [C0603_DWS]  28.57,56.01 0 top
C113  1uF  [C0603_DWS]  28.83,61.85 0 top
C114  100nF  [C0603_DWS]  76.58,34.67 270 top
C115  100nF  [C0603_DWS]  79.63,34.67 270 top
C116  10uF/6.3V  [C0603_DWS]  24.89,68.33 270 top
C117  1nF  [C0603_DWS]  26.42,68.33 270 top
C118  10uF/6.3V  [C0603_DWS]  19.05,68.33 90 top
C119  100nF  [C0603_DWS]  78.11,34.67 270 top
C120  1uF  [C0603_DWS]  28.83,64.9 0 top
C121  1uF  [C0603_DWS]  27.94,67.82 90 top
C122  10uF/6.3V  [C0603_DWS]  82.8,26.67 180 top
C123  10uF/6.3V  [C0603_DWS]  82.8,28.19 180 top
C124  100pF  [C0603_DWS]  39.75,69.22 0 top
C125  10uF/6.3V  [C0603_DWS]  17.27,68.33 90 top
C126  NA(10uF/6.3V)  [C0603_DWS]  26.04,53.59 270 top
D1  1N5819(S4SOD-123)  [SOD-123]  81.03,56.39 180 top
D2  SMBJ6.0A  [DO214AA]  10.54,66.8 90 top
FET1  IRFML8244TRPbF  [SOT23]  10.16,61.59 90 top
FUSE1  FSMD035  [1206]  86.21,58.62 0 top
GND  TESTPADTESTPAD_40-ROUND  [TESTPAD_40-ROUND]  26.29,66.04 270 bottom
GPIO-1  BH40S  [ML40-MALE(GBH-254-SMT-40)]  36.07,5.71 180 top
GPIO-2  BH14S  [ML14_S]  77.72,5.71 180 top
GPIO-3  BH10S  [ML10_S]  95.89,10.16 90 top
HDMI  HDMI-SWM-19  [HDMI-SWM-19]  89.18,64.95 0 top
HPBP  TESTPADTESTPAD_40-ROUND  [TESTPAD_40-ROUND]  77.47,61.98 0 top
HVREG1  TESTPADTESTPAD_40-ROUND  [TESTPAD_40-ROUND]  75.69,61.98 0 top
HVREG2  TESTPADTESTPAD_40-ROUND  [TESTPAD_40-ROUND]  73.91,61.98 0 top
JTAG2PB_E  Open  [SJ_1_SMALLER]  81.28,20.45 180 top
JTAG-DEBUG  NA(HN1X10)  [HN1X10]  77.47,12.95 0 top
L1  FB0805/600R/200mA(201209-601)  [L0805_5MIL_DWS]  33.02,13.72 270 top
L2  FB0805/600R/200mA(201209-601)  [L0805_5MIL_DWS]  19.18,26.8 0 top
L3  FB0805/600R/200mA(201209-601)  [L0805_5MIL_DWS]  27.97,30.61 90 top
L4  CL470nH/0805/1.76R/250mA  [L0805_5MIL_DWS]  82.8,42.04 0 top
L5  CL470nH/0805/1.76R/250mA  [L0805_5MIL_DWS]  75.18,42.04 180 top
L6  FB0805/600R/2A  [L0805_5MIL_DWS]  9.75,39.34 90 top
L7  FB0805/600R/200mA(201209-601)  [L0805_5MIL_DWS]  9.78,31.24 270 top
L8  FB0805/600R/2A  [L0805_5MIL_DWS]  16.76,46.86 180 top
L9  FB0805/600R/2A  [L0805_5MIL_DWS]  16.76,48.9 180 top
L10  2.2uH/1.5A/DCR<0.1R/CD32  [CD32]  14.99,57.66 0 top
L11  2.2uH/1.5A/DCR<0.1R/CD32  [CD32]  21.59,53.98 90 top
L12  2.2uH/1.5A/DCR<0.1R/CD32  [CD32]  28.57,58.93 0 top
L13  22uH/0.6R/0603  [L0805_5MIL_DWS]  76.07,27.3 270 top
L14  2.2uH/1.5A/DCR<0.1R/CD32  [CD32]  21.97,68.07 90 top
L15  22uH/0.6R/0603  [L0805_5MIL_DWS]  80.14,27.3 270 top
L16  22uH/0.6R/0603  [L0805_5MIL_DWS]  78.11,27.3 270 top
LAN  RJLBC-060TC1  [RJLBC-060TC1]  5.87,19.68 270 top
LCD_CON  BH40S  [ML40-MALE(GBH-254-SMT-40)]  36.07,75.56 0 top
LED1  LED/GREEN/0603  [LED-0603]  1.65,53.47 90 top
LINE_IN  PJ-W47S-05D2-LF_V2  [PJ-W47S-05D2-LF_5PIN_V2]  102.23,28.32 180 top
MIC/TV  NA(HN1X10)  [HN1X10]  77.47,15.49 0 top
POWER  T1107A(6x3.8x2.5mm)  [SW-TAKT_6X3.5_SMD]  38.1,66.04 90 top
PWR  YDJ-1136  [PWR_JACK_UNI_MILLING]  7.62,61.19 0 top
PWR_LED  LED/RED/0603  [LED-0603]  1.65,58.29 90 top
Q1  Q25.000MHz/HC-49SM/SMD/20ppm/20pF  [HC49/SMD2_THIN]  34.42,22.86 270 top
Q2  Q24.000MHz/HC-49SM/SMD/20ppm/20pF  [HC49/SMD2_THIN]  63.75,62.87 180 top
R1  2k/1%  [R0603_5MIL_DWS]  40.91,38.08 90 top
R2  1R  [R0603_5MIL_DWS]  33.4,35.05 0 top
R3  2k/1%  [R0603_5MIL_DWS]  36.34,38.08 270 top
R4  NA  [R0603_5MIL_DWS]  40.91,34.77 90 top
R5  2k/1%  [R0603_5MIL_DWS]  40.91,31.47 270 top
R6  22R  [R0603_5MIL_DWS]  63.52,40.23 90 top
R7  22R  [R0603_5MIL_DWS]  65.04,40.23 90 top
R8  240R/1%  [R0603_5MIL_DWS]  52.85,29.82 180 top
R9  2k/1%  [R0603_5MIL_DWS]  36.34,31.47 90 top
R10  240R/1%  [R0603_5MIL_DWS]  66.56,40.23 270 top
R11  240R/1%  [R0603_5MIL_DWS]  36.34,34.77 90 top
R12  2.2k  [R0603_5MIL_DWS]  39.5,12.19 0 top
R13  2.2k  [R0603_5MIL_DWS]  39.5,13.72 180 top
R14  2k/1%  [R0603_5MIL_DWS]  23.88,14.86 90 top
R15  240R/1%  [R0603_5MIL_DWS]  18.8,12.45 0 top
R16  NA  [R0603_5MIL_DWS]  37.08,13.34 270 top
R17  240R/1%  [R0603_5MIL_DWS]  18.8,13.97 0 top
R18  NA  [R0603_5MIL_DWS]  73.79,27.3 90 top
R19  NA(1M)  [R0603_5MIL_DWS]  82.55,52.45 180 top
R20  10k  [R0603_5MIL_DWS]  82.55,50.93 180 top
R21  47k  [R0603_5MIL_DWS]  10.41,56.26 180 top
R22  NA  [R0603_5MIL_DWS]  66.17,55.5 90 top
R23  10k  [R0603_5MIL_DWS]  82.55,53.98 180 top
R24  0R(Board_Mounted)  [0603_0R]  67.69,55.5 270 top
R25  NA(1M)  [R0603_5MIL_DWS]  78.49,53.85 180 top
R26  2.2k  [R0603_5MIL_DWS]  81.92,62.87 0 top
R27  10k  [R0603_5MIL_DWS]  75.06,38.35 0 top
R28  200k/1%  [R0603_5MIL_DWS]  73.79,55.5 270 top
R29  2.2k  [R0603_5MIL_DWS]  81.92,61.34 0 top
R30  47k  [R0603_5MIL_DWS]  81.92,59.82 180 top
R31  10k  [R0603_5MIL_DWS]  75.06,40.26 0 top
R32  4.99k/1%  [R0603_5MIL_DWS]  14.61,29.84 90 top
R33  10k  [R0603_5MIL_DWS]  19.81,32.77 90 top
R34  13k/1%  [R0603_5MIL_DWS]  17.91,29.46 0 top
R35  10k  [R0603_5MIL_DWS]  13.08,29.84 270 top
R36  10k  [R0603_5MIL_DWS]  25.15,39.62 270 top
R37  13k/1%  [R0603_5MIL_DWS]  19.3,39.37 270 top
R38  NA  [R0603_5MIL_DWS]  46.86,68.2 270 top
R39  NA  [R0603_5MIL_DWS]  45.34,68.2 270 top
R40  1R  [R0603_5MIL_DWS]  70.74,58.8 270 top
R41  47k  [R0603_5MIL_DWS]  11.56,33.15 90 top
R42  2.2k  [R0603_5MIL_DWS]  87.63,74.42 0 top
R43  2.2k  [R0603_5MIL_DWS]  87.63,75.95 0 top
R44  47k  [R0603_5MIL_DWS]  87.63,77.47 0 top
R45  47k  [R0603_5MIL_DWS]  55.88,12.19 0 top
R46  10k  [R0603_5MIL_DWS]  77.85,18.54 180 top
R47  10k  [R0603_5MIL_DWS]  77.85,20.07 180 top
R48  1R  [R0603_5MIL_DWS]  14.73,67.69 0 top
R49  2.2k  [R0603_5MIL_DWS]  3.17,53.47 90 top
R50  47k  [R0603_5MIL_DWS]  14.73,63.63 180 top
R51  2.2k  [R0603_5MIL_DWS]  14.73,60.58 180 top
R52  2.2k  [R0603_5MIL_DWS]  14.73,62.1 180 top
R53  47k  [R0603_5MIL_DWS]  10.41,58.8 180 top
R54  1k  [R0603_5MIL_DWS]  36.45,69.22 180 top
R55  2.2k  [R0603_5MIL_DWS]  3.17,58.29 90 top
RM1  RA1206_(4X0603)_4B8_4.7k  [R_MATRIX_4]  18.92,18.29 180 top
RM2  RA1206_(4X0603)_4B8_4.7k  [R_MATRIX_4]  23.39,30.23 270 top
RM3  RA1206_(4X0603)_4B8_51R  [R_MATRIX_4]  26.8,14.86 90 top
RM4  RA1206_(4X0603)_4B8_100K  [R_MATRIX_4]  82.55,48.13 0 top
RM5  RA1206_(4X0603)_4B8_100K  [R_MATRIX_4]  78.49,51.05 180 top
RM6  RA1206_(4X0603)_4B8_51R  [R_MATRIX_4]  77.72,31.24 270 top
SD/MMC1  MICRO_SD+CP  [TFR-MEM-CON]  85.72,48.26 270 top
SD/MMC2  PSD006A-LT2-BA0  [SD_CARD]  87.25,42.55 270 bottom
T1  DTC114YKA  [SOT-23]  5.97,58.29 90 top
U1  A10S-TFBGA336  [TFBGA336]  52.97,49.61 90 top
U2  H5TQ2G83CFR-H9C  [FBGA78]  46.37,32.16 0 top
U3  H5TQ2G83CFR-H9C  [FBGA78]  59.29,32.16 0 top
U4  RTL8201CP  [LQFP48]  26.06,22.35 180 top
U5  AT24C16BN-SH  [SO-08MN]  43.99,16.81 180 top
U6  RCLAMP0524P  [SLP2510P8]  86.59,68 270 top
U7  RCLAMP0524P  [SLP2510P8]  86.59,64.95 270 top
U8  RCLAMP0524P  [SLP2510P8]  86.59,61.9 270 top
U9  SY6280  [SOT23-5]  17.4,32.38 0 top
U10  SY6280  [SOT23-5]  22.23,39.37 270 top
U11  AXP152  [QFN40_5X5]  21.97,60.58 0 top
U15  FIDUCIAL1X2  [FIDUCIAL-1X2]  1.27,6.99 0 top
U16  FIDUCIAL1X2  [FIDUCIAL-1X2]  1.27,74.3 0 top
U17  FIDUCIAL1X2  [FIDUCIAL-1X2]  100.33,74.3 0 top
U$5  [LOGO-OPENHARDWARE_8X8]  50.8,63.5 0 bottom
U$6  [OLIMEX1_V]  26.54,38.99 0 bottom
U$8  [OLIMEX1_V]  57.33,57.53 0 top
U$9  [PB]  37.97,15.88 0 bottom
U$10  [ESD_SYMBOL]  47.12,12.06 0 bottom
U$11  [RECYCLE_BIN1/8]  35.05,11.94 0 bottom
U$12  [ROHS]  62.99,12.7 0 bottom
UART1  NA(HN1X4)  [HN1X4]  85.09,18.03 0 top
UBOOT/REC  HN1x3(UBOOT:Close;REC:Open)  [JP2]  68.58,18.03 0 top
UEXT  BH10S  [ML10_S]  75.44,75.56 0 top
USB_HOST  USB_A_VERTICAL  [USB_A_VERTICAL_PTH]  -5.71,51.05 270 top
USB_OTG  USB-OTG  [USB_MINI_9PIN]  4.45,35.69 0 top

## Library data of the parts
1.2V_CPU 1.2V_INT 1.5V 3.0VA 3.3V AUDIO_OUT BOOT/REC D1 FUSE1 GND HPBP HVREG1 HVREG2 LINE_IN POWER PWR U5 = gogo
1.2V_CPU_E 1.2V_INT_E 1.5V_E 3.0VA_E 3.3V_E 5V/LDO0 JTAG2PB_E UBOOT/REC = jumper
C1-C126 L1-L9 L13 L15 L16 R1-R23 R25-R55 = rcl
D2 L10-L12 L14 R24 RM1-RM6 T1 = OLIMEX_DISCRET
FET1 JTAG-DEBUG MIC/TV UART1 = Penko
GPIO-1-GPIO-3 LCD_CON UEXT = con-harting-ml
HDMI LAN SD/MMC1 SD/MMC2 USB_HOST USB_OTG = OLIMEX_CONNECTORS
LED1 PWR_LED = DOUBLE-SIDE
Q1 Q2 = crystal
U1-U4 U6-U11 = OLIMEX_IC
U15-U17 = SparkFunEagle-6-6-07
U$5 U$6 U$8-U$12 = olimex_logo1

## Nets
+5V: 5V/LDO0.3 C88.1 C95.1 D2.C FET1.2 FUSE1.1 GPIO-1.1 GPIO-3.1 LCD_CON.1 PWR.+ R26.1 R29.1 R48.2 U9.5 U10.5 U11.29 U11.30
+5V_OTG_PWR: C87.1 FET1.3 L6.1 R53.2 USB_OTG.VBUS
A0: U1.V7 U2.K3 U3.K3
A1: U1.R4 U2.L7 U3.L7
A2: U1.U8 U2.L3 U3.L3
A3: U1.U7 U2.K2 U3.K2
A4: U1.P3 U2.L8 U3.L8
A5: U1.V8 U2.L2 U3.L2
A6: U1.R3 U2.M8 U3.M8
A7: U1.V10 U2.M2 U3.M2
A8: U1.T3 U2.N8 U3.N8
A9: U1.V9 U2.M3 U3.M3
A10: U1.M3 U2.H7 U3.H7
A11: U1.T4 U2.M7 U3.M7
A12: U1.P4 U2.K7 U3.K7
A13: U1.U9 U2.N3 U3.N3
A14: U1.U3 U2.N7 U3.N7
AVDD33: C47.2 C48.2 L1.1 U4.36
BA0: U1.U6 U2.J2 U3.J2
BA1: U1.N3 U2.K8 U3.K8
BA2: U1.V6 U2.J3 U3.J3
CASN: U1.V4 U2.G3 U3.G3
CKE: U1.L3 U2.G9 U3.G9
CLK: R6.1 U2.F7 U3.F7
CLKN: R7.1 U2.G7 U3.G7
D0: U1.K1 U2.B3
D1: U1.U2 U2.C7
D2: U1.J2 U2.C2
D3: U1.V1 U2.C8
D4: U1.J3 U2.E3
D5: U1.W1 U2.E8
D6: U1.J1 U2.D2
D7: U1.V2 U2.E7
D8: U1.T1 U3.B3
D9: U1.M1 U3.C7
D10: U1.U1 U3.C2
D11: U1.K2 U3.C8
D12: U1.R2 U3.E3
D13: U1.L1 U3.E8
D14: U1.T2 U3.D2
D15: U1.L2 U3.E7
DDR3_CK: R6.2 U1.W2
DDR3_CK_N: R7.2 U1.Y1
DDR3_CS0: U1.V5 U2.H2 U3.H2
DDR3_CS1: U1.N4 U2.H1 U3.H1
DDR3_ODT0: U1.V11 U2.G1 U3.G1
DDR3_RST: U1.U10 U2.N2 U3.N2
DQM0: U1.P1 U2.B7
DQM1: U1.M2 U3.B7
DQS0: U1.N1 U2.C3
DQS0_N: U1.N2 U2.D3
DQS1: U1.P2 U3.C3
DQS1_N: U1.R1 U3.D3
DRAM-REF: C22.2 C23.2 C30.2 C31.2 R4.1 R5.1 R9.2 U2.E1 U2.J8 U3.E1 U3.J8
DVDD33 [PWR]: C58.2 C59.2 C60.2 L2.1 U4.14 U4.48
DZQ: R11.2 U1.K3
ECOL: U1.D14 U4.1
ECRS: U1.C13 U4.23
EMDC: U1.C12 U4.25
EMDIO: RM1.1.2 U1.D13 U4.26
EPHY-RST#: R16.1 U1.C14
ERXCK: U1.D10 U4.16
ERXD0: U1.C7 U4.21
ERXD1: U1.D7 U4.20
ERXD2: U1.C6 U4.19
ERXD3: U1.D6 U4.18
ERXDV: U1.D11 U4.22
ERXERR: U1.C10 U4.24
ETXCK: U1.D12 U4.7
ETXD0: U1.C9 U4.6
ETXD1: U1.D9 U4.5
ETXD2: U1.C8 U4.4
ETXD3: U1.D8 U4.3
ETXEN: U1.C11 U4.2
FMINL: MIC/TV.3 U1.W16
FMINR: MIC/TV.4 U1.V16
GND [PWR]: BOOT/REC.P$1 C1.1 C2.1 C3.1 C4.1 C5.1 C6.1 C7.1 C9.1 C10.1 C11.1 C12.1 C13.1 C14.1 C15.1 C16.1 C17.1 C18.1 C19.1 C20.1 C21.1 C23.1 C24.1 C25.1 C26.1 C27.1 C28.1 C29.1 C30.1 C31.1 C32.1 C33.1 C34.1 C35.1 C36.1 C37.1 C38.1 C39.1 C40.1 C41.1 C42.1 C43.1 C44.1 C45.1 C46.1 C47.1 C48.1 C49.1 C50.1 C51.1 C52.1 C53.1 C54.1 C55.1 C56.1 C57.1 C58.1 C59.1 C60.1 C61.1 C62.1 C63.2 C64.2 C65.2 C66.1 C67.1 C68.1 C69.1 C70.1 C71.1 C72.1 C73.1 C74.1 C75.1 C76.1 C78.1 C79.1 C80.1 C81.1 C82.1 C83.1 C84.1 C85.2 C86.- C87.2 C88.2 C89.1 C90.1 C91.1 C92.1 C93.1 C94.- C95.2 C96.2 C97.2 C98.1 C99.2 C100.2 C101.2 C102.2 C103.2 C104.2 C105.2 C106.2 C107.2 C108.2 C109.2 C110.2 C111.2 C112.2 C113.2 C114.1 C115.1 C116.2 C117.2 C118.2 C119.1 C120.2 C121.2 C124.2 C125.2 C126.2 D2.A GND.1 GPIO-1.2 GPIO-1.4 GPIO-2.2 GPIO-2.14 GPIO-3.2 GPIO-3.4 HDMI.2 HDMI.5 HDMI.8 HDMI.11 HDMI.17 HDMI.SH1 HDMI.SH2 HDMI.SH3 HDMI.SH4 JTAG2PB_E.1 JTAG-DEBUG.9 JTAG-DEBUG.10 L7.1 L9.1 LAN.GND1 LAN.GND2 LCD_CON.2 LCD_CON.4 LED1.C LINE_IN.5 MIC/TV.10 POWER.P$2 PWR.- R3.1 R8.1 R9.1 R10.1 R11.1 R14.1 R17.2 R19.2 R22.2 R24.1 R25.2 R28.2 R30.2 R33.1 R34.1 R35.1 R36.1 R37.1 RM1.3.2 RM2.2.1 RM2.3.1 RM2.4.1 RM4.4.1 SD/MMC1.6 SD/MMC2.3 SD/MMC2.6 SD/MMC2.SH1 SD/MMC2.SH2 SD/MMC2.WP T1.2 U1.D4 U1.G5 U1.H8 U1.H9 U1.H10 U1.H11 U1.H12 U1.H13 U1.J8 U1.J9 U1.J10 U1.J11 U1.J12 U1.J13 U1.K4 U1.K5 U1.K8 U1.K9 U1.K10 U1.K11 U1.K12 U1.K13 U1.L5 U1.L8 U1.L9 U1.L10 U1.L11 U1.L12 U1.L13 U1.M8 U1.M9 U1.M10 U1.M11 U1.M12 U1.M13 U1.N8 U1.N9 U1.N10 U1.N11 U1.N12 U1.N13 U1.N16 U1.P5 U1.R5 U1.T7 U1.T8 U1.T12 U1.U12 U1.U15 U1.U16 U1.V19 U2.A1 U2.A8 U2.B1 U2.B2 U2.B8 U2.C9 U2.D1 U2.D8 U2.D9 U2.F2 U2.F8 U2.J1 U2.J9 U2.L1 U2.L9 U2.N1 U2.N9 U3.A1 U3.A8 U3.B1 U3.B2 U3.B8 U3.C9 U3.D1 U3.D8 U3.D9 U3.F2 U3.F8 U3.J1 U3.J9 U3.L1 U3.L9 U3.N1 U3.N9 U4.11 U4.17 U4.29 U4.35 U4.40 U4.43 U4.45 U5.1 U5.2 U5.3 U5.4 U5.7 U6.3 U6.8 U7.3 U7.8 U8.3 U8.8 U9.2 U10.2 U11.3 U11.6 U11.14 U11.26 U11.36 U11.N1 U11.N2 U11.N3 U11.N4 U11.N5 U11.N6 U11.N7 U11.N8 U11.N9 U11.N10 U11.N11 U11.N12 U11.N13 U11.N14 U11.N15 U11.N16 U11.N17 U11.VSS UART1.4 UEXT.2 USB_HOST.4 USB_OTG.GND
HCEC: HDMI.13 U1.R17 U8.1 U8.10
HDMI_5V_SOURCE: FUSE1.2 HDMI.18
HHPD: HDMI.19 R30.1 U1.T17 U8.5 U8.6
HPCOM: L16.1 RM6.2.2 U1.V13 U1.W13
HPOUTL: L15.1 RM6.1.2 U1.Y13
HPOUTR: L13.1 RM6.3.2 U1.Y14
HSCL: HDMI.15 R26.2 U1.R18 U8.2 U8.9
HSDA: HDMI.16 R29.2 U1.T18 U8.4 U8.7
HTX0N: HDMI.9 U1.R19 U7.2 U7.9
HTX0P: HDMI.7 U1.R20 U7.1 U7.10
HTX1N: HDMI.6 U1.P19 U6.5 U6.6
HTX1P: HDMI.4 U1.P20 U6.4 U6.7
HTX2N: HDMI.3 U1.N19 U6.2 U6.9
HTX2P: HDMI.1 U1.N20 U6.1 U6.10
HTXCN: HDMI.12 U1.T19 U7.5 U7.6
HTXCP: HDMI.10 U1.T20 U7.4 U7.7
JTAG_SEL0_N: JTAG-DEBUG.6 R46.1 U1.M20
JTAG_SEL1_N: JTAG2PB_E.2 JTAG-DEBUG.7 R47.1 U1.M19
LCD_CLK: LCD_CON.31 U1.G17
LCD_D0: LCD_CON.21 U1.D15
LCD_D1: LCD_CON.22 U1.C15
LCD_D2: LCD_CON.23 U1.B15
LCD_D3: LCD_CON.24 U1.A15
LCD_D4: LCD_CON.25 U1.D16
LCD_D5: LCD_CON.26 U1.C16
LCD_D6: LCD_CON.27 U1.B16
LCD_D7: LCD_CON.28 U1.A16
LCD_D8: LCD_CON.13 U1.C17
LCD_D9: LCD_CON.14 U1.B17
LCD_D10: LCD_CON.15 U1.A17
LCD_D11: LCD_CON.16 U1.C18
LCD_D12: LCD_CON.17 U1.B18
LCD_D13: LCD_CON.18 U1.A18
LCD_D14: LCD_CON.19 U1.A19
LCD_D15: LCD_CON.20 U1.A20
LCD_D16: LCD_CON.5 U1.B19
LCD_D17: LCD_CON.6 U1.B20
LCD_D18: LCD_CON.7 U1.D17
LCD_D19: LCD_CON.8 U1.D18
LCD_D20: LCD_CON.9 U1.E17
LCD_D21: LCD_CON.10 U1.E18
LCD_D22: LCD_CON.11 U1.F17
LCD_D23: LCD_CON.12 U1.F18
LCD_DE: LCD_CON.32 U1.G18
LCD_HSYNC: LCD_CON.29 U1.H17
LCD_PWR: LCD_CON.35 U1.F2
LCD_VSYNC: LCD_CON.30 U1.H18
LDO0-OUT: 5V/LDO0.2 C102.1 C107.1 C109.1 C112.1 C118.1 C125.1 U11.4 U11.12 U11.19 U11.28 U11.38
LINEINL: C123.2 U1.U17
LINEINR: C122.2 U1.V18
LRADC0: GPIO-2.11 R18.1 U1.Y17
LRADC1: GPIO-2.12 U1.Y18
MIC1OUTN: MIC/TV.1 U1.W18
MIC1OUTP: MIC/TV.2 U1.W17
MICIN1: MIC/TV.6 U1.Y15
MICIN2: MIC/TV.8 U1.W15
MICM: C77.1 MIC/TV.7 R24.2
N$1: R22.1 U1.V17
N$2: HVREG1.1 U1.U18
N$3: R8.2 U2.H8
N$4: HVREG2.1 U1.U19
N$5: R10.2 U3.H8
N$6: R14.2 U4.28
N$7: HPBP.1 U1.U14
N$8: C121.1 U11.15 U11.23
N$9: C122.1 LINE_IN.3
N$10: 3.0VA_E.1 C108.1 U11.22
N$11: C66.2 U1.T16
N$12: RM1.3.1 U4.15
N$13: C123.1 LINE_IN.2
N$14: POWER.P$1 R54.2
N$15: C126.1 U11.9
N$16: PWR_LED.C T1.3
N$17: PWR_LED.A R55.2
N$18: C120.1 U11.20
N$19: FET1.1 PWR.-- R53.1
N$20: 5V/LDO0.1 U11.32
N$22: AUDIO_OUT.5 L16.2
N$23: C103.1 U11.8
N$25: AUDIO_OUT.2 L15.2
N$26: AUDIO_OUT.3 L13.2
N$27: C92.2 D1.C U1.P16
N$32: C69.2 R16.2 RM1.2.2 U4.42
N$33: C73.2 RM3.1.1 RM3.2.1
N$34: C115.2 RM6.1.1
N$35: C119.2 RM6.2.1
N$39: LAN.1 RM3.4.2 U4.34
N$40: LAN.2 RM3.3.2 U4.33
N$41: LAN.7 RM3.2.2 U4.31
N$44: C114.2 RM6.3.1
N$45: LAN.8 RM3.1.2 U4.30
N$47: C72.2 RM3.3.1 RM3.4.1
N$48: L10.1 U11.37
N$49: RM2.2.2 U4.10
N$51: RM2.3.2 U4.12
N$53: LAN.KG R15.1
N$54: LAN.AY RM2.4.2 U4.13
N$55: C63.1 L3.1 U4.8
N$56: C64.1 C65.1 C70.2 L3.2 LAN.3 U4.32
N$57: LAN.KY R17.1
N$58: R23.1 SD/MMC1.12
N$63 [PWR]: 3.3V_E.1 C100.1 C101.1 L10.2 U11.39
N$64: C99.1 R48.1
N$68: R15.2 RM2.1.2 U4.9
N$69: L11.1 U11.5
N$70 [PWR]: 1.2V_CPU_E.1 C105.1 C106.1 L11.2 U11.7
N$71: L12.1 U11.13
N$72 [PWR]: 1.5V_E.1 C110.1 C111.1 L12.2 U11.11
N$74: L14.1 U11.27
N$75 [PWR]: 1.2V_INT_E.1 C116.1 C117.1 L14.2 U11.25
N$88: BOOT/REC.P$2 R45.2 UBOOT/REC.2
N$99: R34.2 U9.3
N$100: C86.+ L6.2 R32.2 U9.1
N$101: R37.2 U10.3
N$110: L9.2 USB_HOST.P$3 USB_HOST.P$4
N$111: C96.1 L8.2 USB_HOST.1
N$122: C81.2 C82.2 U1.W14
N$133: C77.2 U1.V15
N$161: R31.1 SD/MMC2.CD
N$176: C78.2 C79.2 R28.1 U1.V14
N$192: C94.+ L8.1 U10.1
N$229: LCD_CON.33 R38.1
N$230: LCD_CON.34 R39.1
N$231: LED1.A R49.2
N$266: L7.2 USB_OTG.GND1 USB_OTG.GND2 USB_OTG.GND3 USB_OTG.GND4
NMI_N: GPIO-3.6 R50.1 U1.B9 U11.31
PIN0: GPIO-3.7 U11.40
PIN1: GPIO-3.9 U11.1
PIN2: GPIO-3.10 U11.24
PIN3: GPIO-3.8 U1.H20
PIN4/TWI0-SCK: GPIO-1.5 R51.1 U1.L20 U11.35
PIN5/TWI0-SDA: GPIO-1.7 R52.1 U1.L19 U11.34
PIN6/PWM0: GPIO-1.9 LCD_CON.36 U1.K20
PIN7: GPIO-1.11 R38.2 U1.A14
PIN8: GPIO-1.13 R39.2 U1.K19
PIN9: GPIO-1.15 U1.B6
PIN10/TWI1-SCK: GPIO-1.17 GPIO-2.5 R12.2 U1.J20 U5.6
PIN11/TWI1-SDA: GPIO-1.19 GPIO-2.6 R13.1 U1.J19 U5.5
PIN12/NWE: GPIO-1.21 U1.D1
PIN13/NALE: GPIO-1.23 U1.C3
PIN14/NCLE: GPIO-1.25 U1.C2
PIN15/NCE1: GPIO-1.27 U1.C1
PIN16/NCE0: GPIO-1.29 U1.B2
PIN17/NRE: GPIO-1.31 U1.B1
PIN18/NRB0: GPIO-1.33 U1.A1
PIN19/NRB1: GPIO-1.35 U1.A2
PIN20/NDQ0: GPIO-1.37 U1.B3
PIN21/NDQ1: GPIO-1.39 U1.A3
PIN22/NDQ2: GPIO-1.40 U1.C4
PIN23/NDQ3: GPIO-1.38 U1.B4
PIN24/NDQ4: GPIO-1.36 U1.A4
PIN25/NDQ5: GPIO-1.34 U1.D5
PIN26/NDQ6: GPIO-1.32 U1.C5
PIN27/NDQ7: GPIO-1.30 U1.B5
PIN28/NWP: GPIO-1.28 U1.A5
PIN29: GPIO-1.26 U1.F20
PIN30: GPIO-1.24 U1.F19
PIN31: GPIO-1.22 U1.E20
PIN32: GPIO-1.20 U1.E19
PIN33: GPIO-1.18 U1.D20
PIN34: GPIO-1.16 U1.D19
PIN35: GPIO-1.14 U1.C20
PIN36: GPIO-1.12 U1.C19
PIN37/LED1 [PWR]: GPIO-1.10 R49.1 U1.G19
PIN38: GPIO-1.8 U1.G20
PIN39 [PWR]: GPIO-1.6 U1.H19
PIN40/UART3-TX: GPIO-2.3 U1.G1
PIN41/UART3-RX: GPIO-2.4 U1.G2
PIN42: GPIO-2.7 U1.D2
PIN43: GPIO-2.8 U1.E1
PIN44: GPIO-2.9 U1.E2
PIN45: GPIO-2.10 U1.F1
PWRON: C124.1 R54.1 U11.2
RASN: U1.U4 U2.F3 U3.F3
RECOVERY: U1.B11 UBOOT/REC.3
RESET_N: C75.2 GPIO-3.5 JTAG-DEBUG.8 R21.1 T1.1 U1.A8 U11.33
RTC-VCC: C113.1 R50.2 U11.18
SD0-CLK: SD/MMC1.5 U1.K18
SD0-CMD: R20.1 SD/MMC1.3 U1.K17
SD0-D0: RM4.2.1 SD/MMC1.7 U1.L17
SD0-D1: RM4.3.1 SD/MMC1.8 U1.L18
SD0-D2: RM4.1.1 SD/MMC1.1 U1.J17
SD0-D3: R19.1 SD/MMC1.2 U1.J18
SD0-DET#: RM4.4.2 SD/MMC1.10 U1.A10
SD1-CLK: SD/MMC2.5 U1.B12
SD1-CMD: R27.1 SD/MMC2.2 U1.A11
SD1-D0: RM5.2.1 SD/MMC2.7 U1.A12
SD1-D1: RM5.3.1 SD/MMC2.8 U1.B13
SD1-D2: RM5.1.1 SD/MMC2.9 U1.A13
SD1-D3: R25.1 SD/MMC2.1 U1.B14
SD1-DET#: R31.2 RM5.4.1 U1.H3
SD_VCC: C74.2 C76.2 L4.2 SD/MMC1.4
SD_VCC1: C80.2 C83.2 L5.2 SD/MMC2.4
SPI2-CLK/JTAG_CKO: JTAG-DEBUG.3 U1.E4 UEXT.9
SPI2-CS0/JTAG_MS0: JTAG-DEBUG.2 R44.1 U1.E3 UEXT.10
SPI2-MISO/JTAG_DI0: JTAG-DEBUG.5 U1.F4 UEXT.7
SPI2-MOSI/JTAG_DO0: JTAG-DEBUG.4 U1.F3 UEXT.8
SVREF: C8.2 C9.2 C49.2 C50.2 R1.1 R3.2 R4.2 U1.L4 U1.U11
TPX1: C89.2 LCD_CON.37 U1.Y20
TPX2: C90.2 LCD_CON.38 U1.Y19
TPY1: C91.2 LCD_CON.39 U1.W20
TPY2: C93.2 LCD_CON.40 U1.W19
TVOUT: MIC/TV.9 U1.M18
TWI2-SCK: R42.1 U1.A7 UEXT.5
TWI2-SDA: R43.1 U1.B8 UEXT.6
UART0-RX: U1.G4 UART1.3
UART0-TX: U1.G3 UART1.2
UART2-RX: U1.B7 UEXT.4
UART2-TX: U1.A6 UEXT.3
UBOOT: U1.A9 UBOOT/REC.1
UDM0: U1.P18 USB_OTG.D-
UDM1: U1.N18 USB_HOST.2
UDP0: U1.P17 USB_OTG.D+
UDP1: U1.N17 USB_HOST.3
USB0-DRV: R33.2 U1.H1 U9.4
USB0-IDDET: R41.2 U1.H2 USB_OTG.ID
USB0-VBUSDET: C85.1 R32.1 R35.2 U1.B10
USB1-DRV [PWR]: R36.2 U1.D3 U10.4
V12_DLL: C10.2 C11.2 C12.2 R2.1 U1.J4 U1.J5
V33_HDMI: C97.1 C98.2 R40.2 U1.R16
V+: 1.5V.1 1.5V_E.2 C1.2 C2.2 C3.2 C4.2 C5.2 C6.2 C7.2 C8.1 C22.1 C24.2 C25.2 C26.2 C27.2 C28.2 C29.2 C32.2 C33.2 C34.2 C35.2 C36.2 C37.2 R1.2 R5.2 U1.M5 U1.N5 U1.T5 U1.T6 U1.T9 U1.T10 U1.T11 U2.A2 U2.A9 U2.B9 U2.C1 U2.D7 U2.E2 U2.E9 U2.G2 U2.G8 U2.K1 U2.K9 U2.M1 U2.M9 U3.A2 U3.A9 U3.B9 U3.C1 U3.D7 U3.E2 U3.E9 U3.G2 U3.G8 U3.K1 U3.K9 U3.M1 U3.M9
VCC [PWR]: 3.3V.1 3.3V_E.2 C51.2 C52.2 C53.2 C54.2 C55.2 C56.2 C57.2 C84.2 C104.1 D1.A GPIO-1.3 GPIO-2.1 GPIO-3.3 JTAG-DEBUG.1 L1.2 L2.2 L4.1 L5.1 LAN.AG LCD_CON.3 R12.1 R13.2 R20.2 R21.2 R23.2 R27.2 R40.1 R41.1 R42.2 R43.2 R44.2 R45.1 R46.2 R47.2 R51.2 R52.2 R55.1 RM1.1.1 RM1.2.1 RM2.1.1 RM4.1.2 RM4.2.2 RM4.3.2 RM5.1.2 RM5.2.2 RM5.3.2 RM5.4.2 U1.E5 U1.F5 U1.G16 U1.H16 U1.J16 U1.K16 U1.L16 U1.T14 U4.37 U4.38 U4.39 U4.41 U4.44 U5.8 U11.10 UART1.1 UEXT.1
VCC/2: 1.2V_CPU.1 1.2V_CPU_E.2 C38.2 C39.2 C40.2 C41.2 C42.2 C43.2 C44.2 C45.2 C46.2 U1.E6 U1.E7 U1.E8 U1.E9 U1.E10 U1.E11 U1.E12 U1.E13 U1.E14
VCCINT: 1.2V_INT.1 1.2V_INT_E.2 C13.2 C14.2 C15.2 C16.2 C17.2 C18.2 C19.2 C20.2 C21.2 R2.2 U1.E15 U1.E16 U1.F16 U1.H4 U1.H5 U1.M16 U1.M17 U1.T13 U1.U13
VMIC: MIC/TV.5 U1.Y16
VPP [PWR]: 3.0VA.1 3.0VA_E.2 C71.2 GPIO-2.13 R18.2 U1.T15
WEN: U1.V3 U2.H3 U3.H3
XTALI: C67.2 Q2.2 U1.U20
XTALI1: C61.2 Q1.2 U4.46
XTALO: C68.2 Q2.1 U1.V20
XTALO1: C62.2 Q1.1 U4.47

## Tracks (layer width: path | path; a pad name or v marks a point on that pad's centre or on a via)
+5V  (via drill 0.4, 0.6, 0.6 pad 0.46)
  Top 0.203: 20.17,63.88 U11.30 | U11.29 20.57,63.63 20.32,63.88 20.24,63.88
  Top 0.305: U10.5 23.75,40.32 C95.1 | U9.5 16.45,34.04 C88.1
  Top 0.61: v14.1,34.04 C88.1 | C95.1 23.75,42.55 v23.24,43.05 | 20.24,63.88 20.17,63.88 18.87,63.88 v16.84,65.91 5V/LDO0.3 15.88,67.44 R48.2 | LCD_CON.1 11.94,72.26 | R26.1 R29.1 | v62.1,0.89 62.1,5.71 60.2,7.62 GPIO-1.1
  Top 0.813: FUSE1.1 84.81,58.24 v83.08,58.24 80.8,58.24 78.74,60.3 v78.74,62.87 R26.1 | v11.94,75.06 LCD_CON.1 | GPIO-3.1 100.08,5.08 v100.08,4.06
  Top 1.016: PWR.+ 7.62,64.26 10.54,64.26 | 10.54,64.26 D2.C | FET1.2 11.05,62.55 11.05,64.26 | 10.54,64.26 11.05,64.26 | 11.05,64.26 v11.05,66.17 | v91.57,56.13 85.98,56.13 84.81,57.3 84.81,58.24
  Bottom 0.508: v23.24,43.05 23.24,41.66 18.54,36.96 18.54,35.94 16.64,34.04 v14.1,34.04 12.06,34.04 9.65,31.62 0.64,31.62 | 62.1,0.64 v62.1,0.89 | 62.1,0.64 13.59,0.64 2.54,11.68 2.54,26.92 0.64,28.83 0.64,31.62 | 0.64,31.62 0.64,61.59 2.92,63.88 7.62,63.88 PWR.+ | 62.1,0.64 96.65,0.64 v100.08,4.06
  Bottom 0.61: v91.57,56.13 91.57,55.75 94.74,52.58 94.74,42.29 100.08,36.96 v100.08,4.06
  Bottom 1.016: v11.05,66.17 11.05,67.18 | 11.05,67.18 15.57,67.18 v16.84,65.91 | 11.05,67.18 11.05,74.17 v11.94,75.06
+5V_OTG_PWR  (via drill 0.6, 0.6 pad 0.46)
  Top 0.61: USB_OTG.VBUS 8.71,37.29 L6.1 9.88,38.46 C87.1 v11.58,37.47 | v9.53,57.78 R53.2
  Top 1.016: FET1.3 9.53,61.59 R53.2
  Bottom 0.61: v11.58,37.47 10.92,37.47 4.57,43.81 4.57,53.59 8.76,57.78 v9.53,57.78
A0  (via drill 0.25 pad 0.46)
  Top 0.107: U1.V7 58.17,47.01 59.34,47.01 59.67,46.69 61.52,46.69 62.48,45.72 65.7,45.72 68.85,42.57 68.85,28.6 63.09,22.84 v62.37,22.84
  Top 0.127: U2.K3 45.06,29.76 45.98,28.84 45.98,25.31 48.45,22.84 v49.47,22.84 | U3.K3 57.99,29.76 58.89,28.86 58.89,25.3 61.36,22.84 v62.37,22.84
  Bottom 0.127: v49.47,22.84 v62.37,22.84
A1  (via drill 0.2, 0.25 pad 0.46)
  Top 0.107: v55.57,45.06 U1.R4 | v65.88,33.66 66.06,33.48 66.06,30.51 63.97,28.42 v63.67,28.42
  Top 0.127: U2.L7 v48.37,28.56 | U3.L7 61.29,28.56 61.89,28.56 62.09,28.36 62.09,27.96 62.29,27.76 62.68,27.76 62.76,27.69 63.24,27.69 63.67,28.12 v63.67,28.42
  Bottom 0.107: v55.57,45.06 55.9,44.74 55.9,44.24 56.23,43.92 58.74,43.92 65.66,37.01 65.66,33.88 v65.88,33.66
  Bottom 0.127: v63.67,28.42 63.67,28.12 63.24,27.69 50.03,27.69 49.53,28.18 48.75,28.18 v48.37,28.56
A2  (via drill 0.2, 0.25 pad 0.46)
  Top 0.107: v57.52,47.66 U1.U8 | v59.6,47.34 59.67,47.4 61.56,47.4 62.74,46.23 65.93,46.23 69.36,42.8 69.36,28.35 62.98,21.97 v62.37,21.97
  Top 0.127: U2.L3 45.1,28.96 45.45,28.61 45.45,25.08 48.56,21.97 v49.47,21.97 | U3.L3 58.03,28.96 58.36,28.63 58.36,25.07 61.46,21.97 v62.37,21.97
  Bottom 0.107: v57.52,47.66 57.85,47.34 v59.6,47.34
  Bottom 0.127: v49.47,21.97 v62.37,21.97
A3  (via drill 0.2, 0.25 pad 0.46)
  Top 0.107: v57.52,47.01 U1.U7 | v59.97,47.01 61.57,47.01 62.61,45.97 65.82,45.97 69.11,42.69 69.11,28.48 63.03,22.4 v61.92,22.4
  Top 0.127: U3.K2 57.29,29.36 58.01,29.36 58.63,28.74 58.63,25.19 61.41,22.4 v61.92,22.4 | U2.K2 44.37,29.36 45.08,29.36 45.71,28.73 45.71,25.2 48.51,22.4 v49.01,22.4
  Bottom 0.107: v57.52,47.01 57.59,46.95 59.9,46.95 v59.97,47.01
  Bottom 0.127: v49.01,22.4 v61.92,22.4
A4  (via drill 0.2, 0.25 pad 0.46)
  Top 0.107: v55.57,44.41 U1.P3 | v65.62,33.12 65.8,32.95 65.8,30.76 64.13,29.08 v64.03,29.08
  Top 0.127: U3.L8 61.89,28.96 62.29,28.56 63.2,28.56 63.72,29.08 v64.03,29.08 | U2.L8 v49.12,28.61
  Bottom 0.107: v65.62,33.12 65.41,33.34 65.41,36.9 58.64,43.66 56.14,43.66 55.57,44.23 v55.57,44.41
  Bottom 0.127: v64.03,29.08 63.72,29.08 63.19,28.55 62.67,28.55 62.61,28.61 v49.12,28.61
A5  (via drill 0.25 pad 0.46)
  Top 0.107: U1.V8 58.17,47.66 61.68,47.66 62.87,46.48 66.05,46.48 69.61,42.91 69.61,28.22 62.93,21.54 v61.92,21.54
  Top 0.127: U3.L2 57.29,28.56 57.91,28.56 58.09,28.37 58.09,24.96 61.51,21.54 v61.92,21.54 | U2.L2 44.37,28.56 45.06,28.56 45.18,28.44 45.18,24.97 48.61,21.54 v49.01,21.54
  Bottom 0.127: v49.01,21.54 v61.92,21.54
A6  (via drill 0.2, 0.25 pad 0.46)
  Top 0.107: v56.22,44.41 U1.R3 | v66.13,34.19 66.31,34.01 66.31,30.35 63.57,27.61 v63.57,27.41
  Top 0.127: v49.17,27.76 U2.M8 | U3.M8 61.69,27.96 62.09,27.56 62.09,27.16 62.48,26.77 63.21,26.77 63.57,27.13 v63.57,27.41
  Bottom 0.107: v56.22,44.41 56.47,44.17 58.85,44.17 65.91,37.11 65.91,34.41 v66.13,34.19
  Bottom 0.127: v49.17,27.76 49.27,27.66 49.32,27.66 50.18,26.8 63.24,26.8 63.57,27.13 v63.57,27.41
A7  (via drill 0.25 pad 0.46)
  Top 0.107: U1.V10 58.17,48.96 61.91,48.96 63.37,47.5 66.5,47.5 70.63,43.37 70.63,27.71 62.73,19.81 v61.92,19.81
  Top 0.127: U3.M2 56.49,27.76 56.49,25.04 61.71,19.81 v61.92,19.81 | U2.M2 43.57,27.76 43.57,25.05 48.81,19.81 v49.9,19.81
  Bottom 0.127: v49.9,19.81 v61.92,19.81
A8  (via drill 0.2, 0.25 pad 0.46)
  Top 0.107: v56.22,45.06 U1.T3 | v66.39,34.72 66.56,34.55 66.56,29.75 64.97,28.14 v64.74,28.14
  Top 0.127: v49.01,26.72 49.01,27.12 U2.N8 | U3.N8 61.69,27.18 62.35,26.52 63.34,26.52 64.03,27.2 64.03,27.69 64.48,28.14 v64.74,28.14
  Bottom 0.107: v56.22,45.06 56.86,44.43 58.96,44.43 66.17,37.22 66.17,34.94 v66.39,34.72
  Bottom 0.127: v49.01,26.72 49.73,26.72 49.9,26.54 63.37,26.54 64.03,27.2 64.03,27.69 64.48,28.14 v64.74,28.14
A9  (via drill 0.25 pad 0.46)
  Top 0.107: U1.V9 58.17,48.31 61.8,48.31 63.12,46.99 66.27,46.99 70.12,43.14 70.12,27.97 62.83,20.68 v61.92,20.68
  Top 0.127: U3.M3 57.29,27.76 57.29,25 61.61,20.68 v61.92,20.68 | U2.M3 44.37,27.76 44.37,25.01 48.71,20.68 v49.01,20.68
  Bottom 0.127: v49.01,20.68 v61.92,20.68
A10  (via drill 0.2, 0.25 pad 0.46)
  Top 0.107: v54.27,44.41 U1.M3 | v64.86,31.52 64.69,31.34 v63.14,31.34
  Top 0.127: U3.H7 61.09,31.36 61.49,30.96 62.75,30.96 v63.14,31.34 | U2.H7 v48.3,31.03
  Bottom 0.107: v54.27,44.41 55.79,42.9 58.3,42.9 64.64,36.56 64.64,31.74 v64.86,31.52
  Bottom 0.127: v48.3,31.03 54.82,31.03 55.01,31.22 55.52,31.22 55.9,30.84 62.63,30.84 v63.14,31.34
A11  (via drill 0.2, 0.25 pad 0.46)
  Top 0.107: v56.87,45.06 U1.T4 | v66.64,35.26 66.82,35.08 66.82,29.62 64.74,27.54 v64.48,27.54
  Top 0.127: v49.47,26.29 48.73,26.29 48.37,26.65 48.37,27.76 U2.M7 | U3.M7 61.29,27.76 61.29,27.2 62.22,26.27 63.47,26.27 64.48,27.28 v64.48,27.54
  Bottom 0.107: v56.87,45.06 57.26,44.68 59.07,44.68 66.42,37.33 66.42,35.48 v66.64,35.26
  Bottom 0.127: v49.47,26.29 63.49,26.29 64.48,27.28 v64.48,27.54
A12  (via drill 0.2, 0.25 pad 0.46)
  Top 0.107: v54.92,45.06 U1.P4 | v65.37,32.59 65.55,32.41 65.55,30.89 64.18,29.52 63.57,29.52 v63.52,29.46
  Top 0.127: U2.K7 v48.37,29.36 | v63.52,29.46 63.47,29.41 62.73,29.41 62.67,29.36 61.29,29.36 U3.K7
  Bottom 0.107: v54.92,45.06 55.25,44.74 55.25,44.2 56.04,43.41 58.53,43.41 65.15,36.79 65.15,32.81 v65.37,32.59
  Bottom 0.127: v63.52,29.46 63.47,29.41 62.65,29.41 62.17,28.93 49.55,28.93 49.12,29.36 v48.37,29.36
A13  (via drill 0.2, 0.25 pad 0.46)
  Top 0.107: v57.52,48.31 U1.U9 | v59.6,47.99 61.74,47.99 62.99,46.74 66.16,46.74 69.87,43.03 69.87,28.09 62.88,21.11 v62.37,21.11
  Top 0.127: v62.37,21.11 61.56,21.11 57.69,24.98 U3.N3 | U2.N3 44.77,24.99 48.66,21.11 v49.47,21.11
  Bottom 0.107: v57.52,48.31 57.85,47.99 v59.6,47.99
  Bottom 0.127: v49.47,21.11 v62.37,21.11
A14  (via drill 0.2, 0.25 pad 0.46)
  Top 0.107: v57.52,45.06 U1.U3 | v66.89,35.79 67.07,35.61 67.07,29.49 63.44,25.86 v61.87,25.86 | 60.89,27.22 U3.N7
  Top 0.127: U2.N7 47.97,26.62 48.73,25.86 v49.01,25.86 | v61.87,25.86 61.87,26.24 60.89,27.22
  Bottom 0.107: v66.89,35.79 66.67,36.01 66.67,37.45 59.19,44.93 57.65,44.93 v57.52,45.06
  Bottom 0.127: v49.01,25.86 v61.87,25.86
AVDD33
  Top 0.203: U4.36 28.81,17.06 29.34,16.54 29.34,16.13 C47.2
  Top 0.61: C47.2 C48.2 32,15.75 L1.1
BA0  (via drill 0.2, 0.25 pad 0.46)
  Top 0.107: v57.52,46.36 U1.U6 | v59.99,46.36 61.46,46.36 62.36,45.47 65.59,45.47 68.6,42.46 68.6,28.73 63.14,23.27 v61.92,23.27
  Top 0.127: U3.J2 57.29,30.16 57.97,30.16 59.16,28.97 59.16,25.41 61.31,23.27 v61.92,23.27 | U2.J2 44.37,30.16 45.04,30.16 46.24,28.96 46.24,25.43 48.4,23.27 v49.01,23.27
  Bottom 0.107: v59.99,46.36 v57.52,46.36
  Bottom 0.127: v49.01,23.27 v61.92,23.27
BA1  (via drill 0.2, 0.25 pad 0.46)
  Top 0.107: v54.92,44.41 U1.N3 | v65.12,32.06 65.3,31.88 65.3,31.02 64.23,29.95 v63.9,29.95
  Top 0.127: U3.K8 62.09,30.16 62.69,30.16 62.81,30.28 63.21,30.28 63.54,29.95 v63.9,29.95 | U2.K8 v49.17,30.16
  Bottom 0.107: v54.92,44.41 54.92,44.19 55.96,43.16 58.41,43.16 64.9,36.67 64.9,32.28 v65.12,32.06
  Bottom 0.127: v63.9,29.95 63.54,29.95 63.21,30.28 51.12,30.28 50.94,30.46 49.47,30.46 v49.17,30.16
BA2  (via drill 0.25 pad 0.46)
  Top 0.107: U1.V6 58.17,46.36 59.34,46.36 59.73,45.97 61.47,45.97 62.23,45.21 65.47,45.21 68.34,42.34 68.34,28.86 63.19,23.7 v62.37,23.7
  Top 0.127: U2.J3 45.02,30.56 46.51,29.07 46.51,25.54 48.35,23.7 v49.47,23.7 | U3.J3 57.95,30.56 59.43,29.08 59.43,25.53 61.26,23.7 v62.37,23.7
  Bottom 0.127: v49.47,23.7 v62.37,23.7
CASN  (via drill 0.25 pad 0.46)
  Top 0.107: U1.V4 58.17,45.06 60.74,45.06 61.35,44.45 65.13,44.45 67.58,42 67.58,29.24 63.34,25 v61.92,25
  Top 0.127: U3.G3 57.69,31.97 60.23,29.43 60.23,25.87 61.1,25 v61.92,25 | U2.G3 44.77,31.95 47.31,29.41 47.31,25.88 48.2,25 v49.01,25